# Altium PCB Tigershark 3D R1.6.PcbDoc (part 1 of 4)
Units mil, origin at the board's own origin, x right, y up, seen from the top; angles counter-clockwise.
Board outline 5500 x 4600 mil, 4 copper layers (Top Layer, Groun Plane, Power Plane, Bottom Layer); 326 components, 251 nets, 1041 pads, 903 vias.
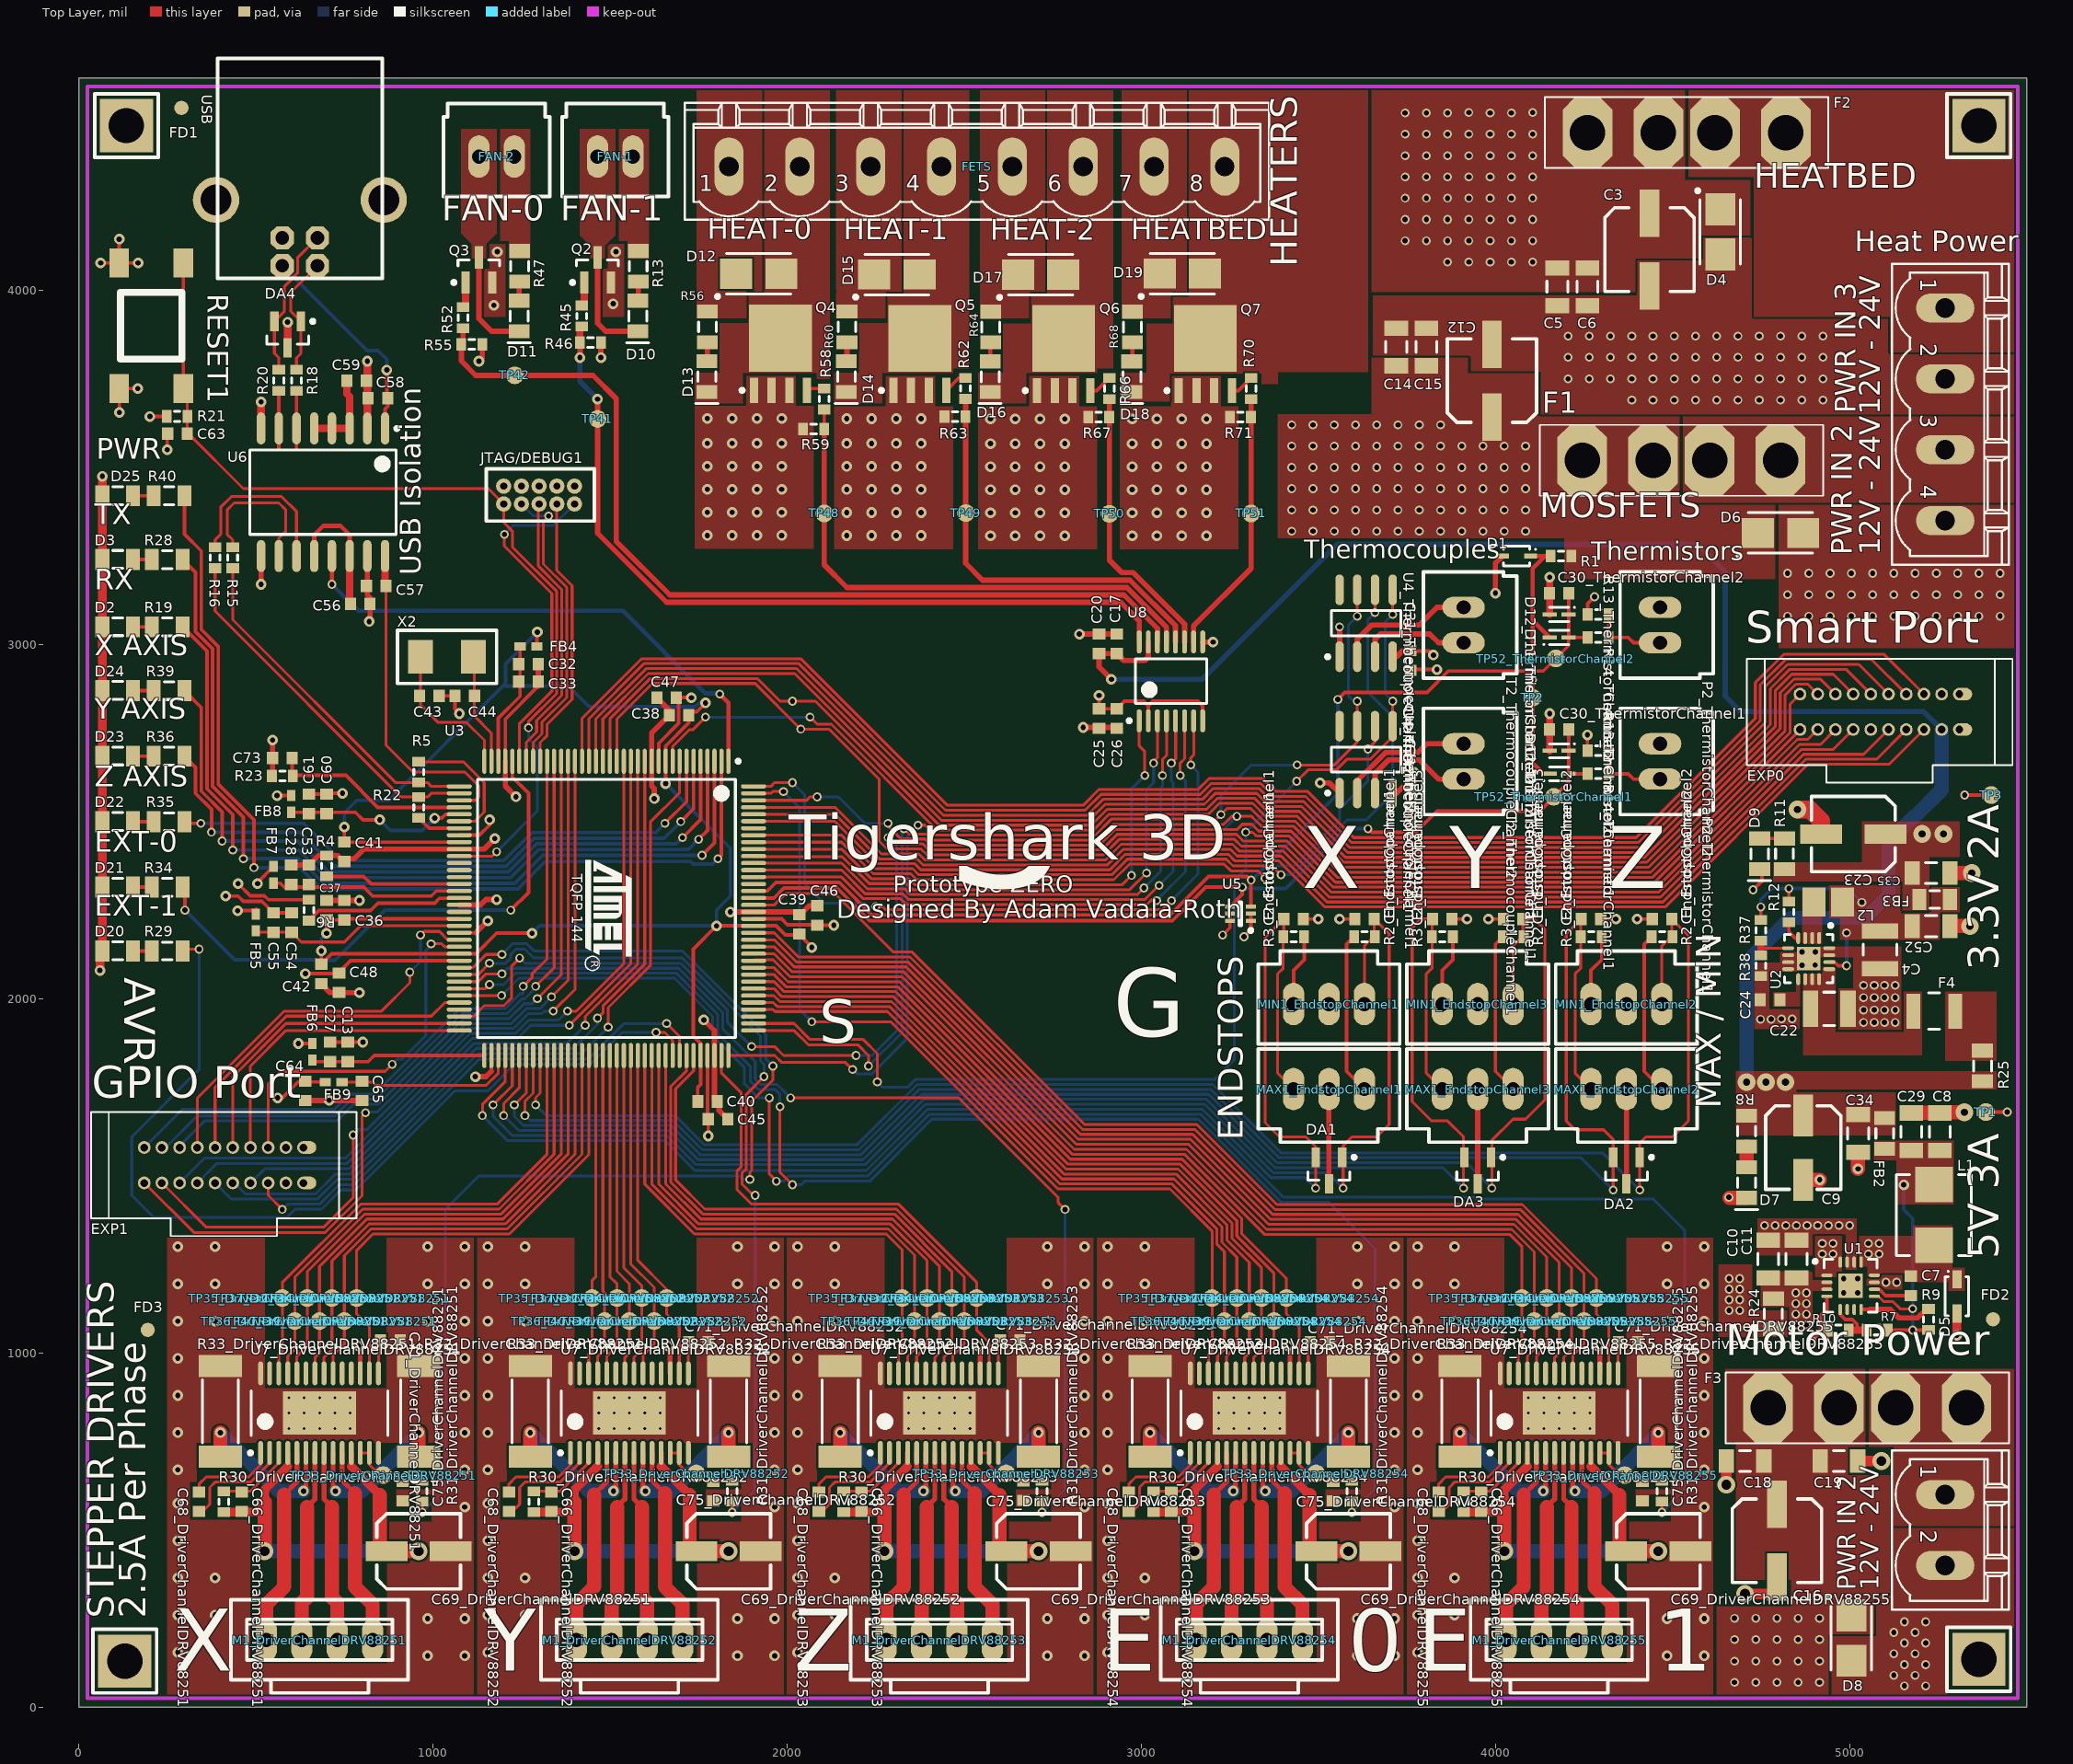
[diagram p0: Top Layer view]
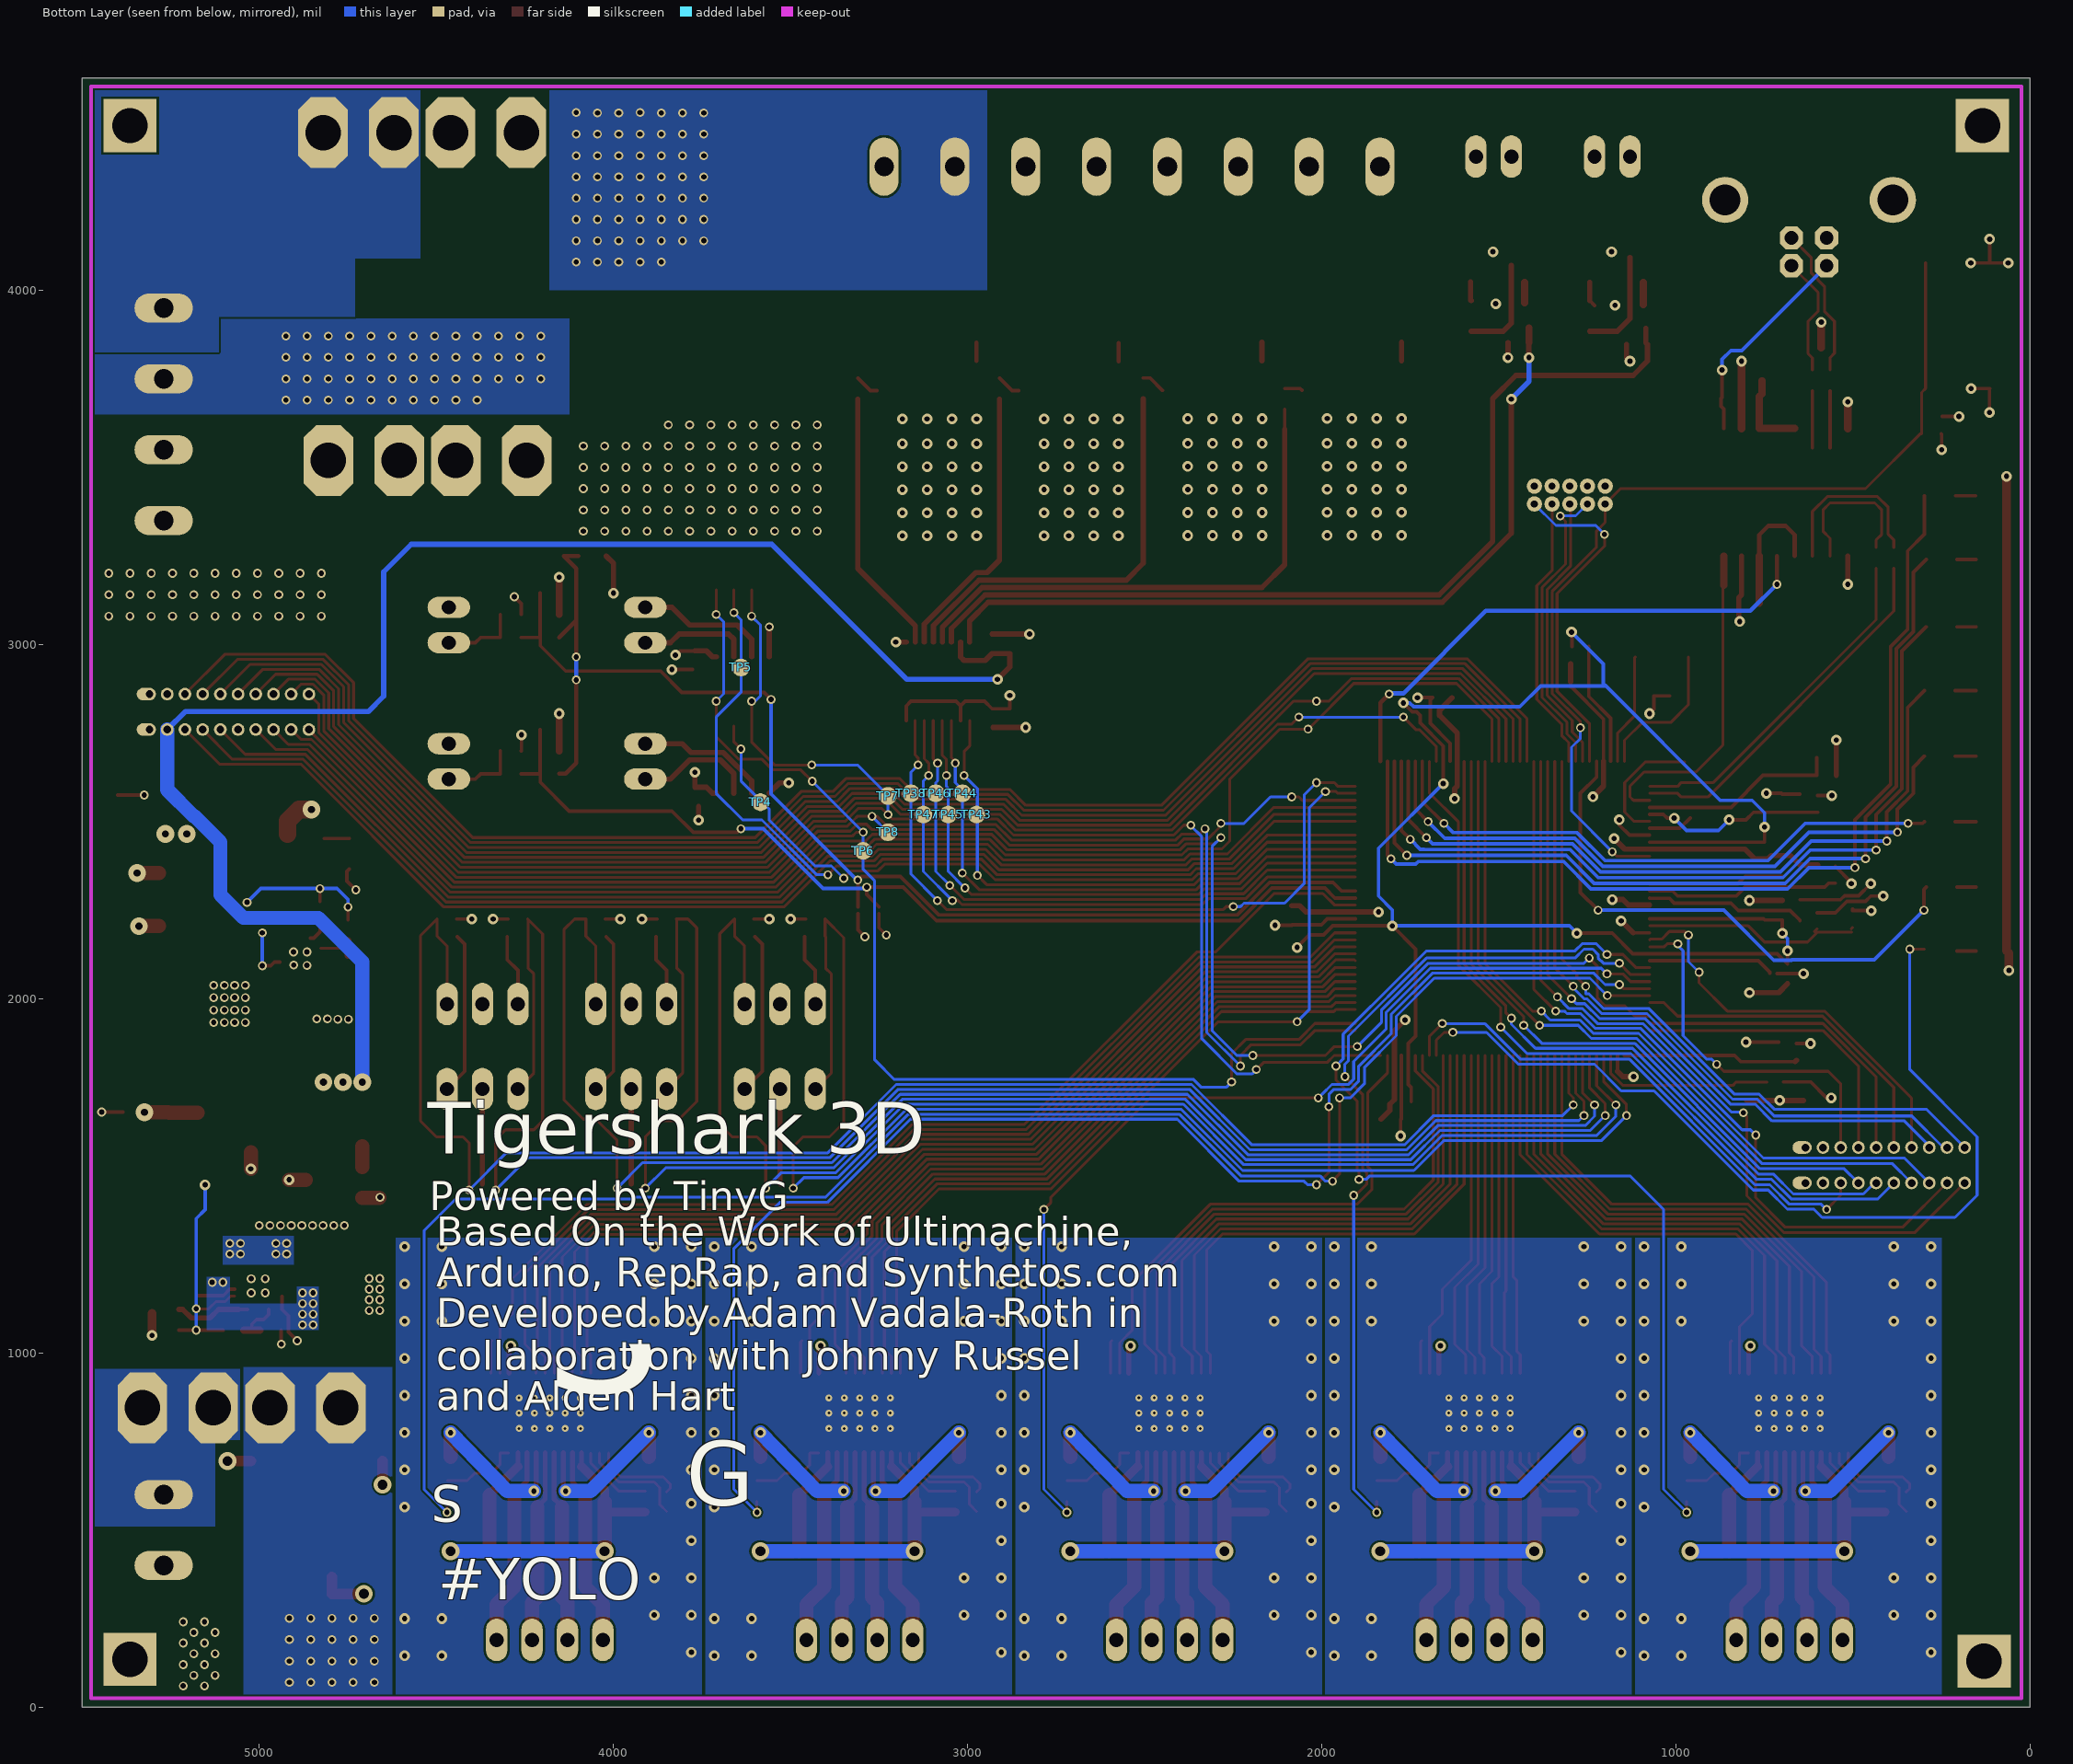
[diagram p1: Bottom Layer view, seen from below]
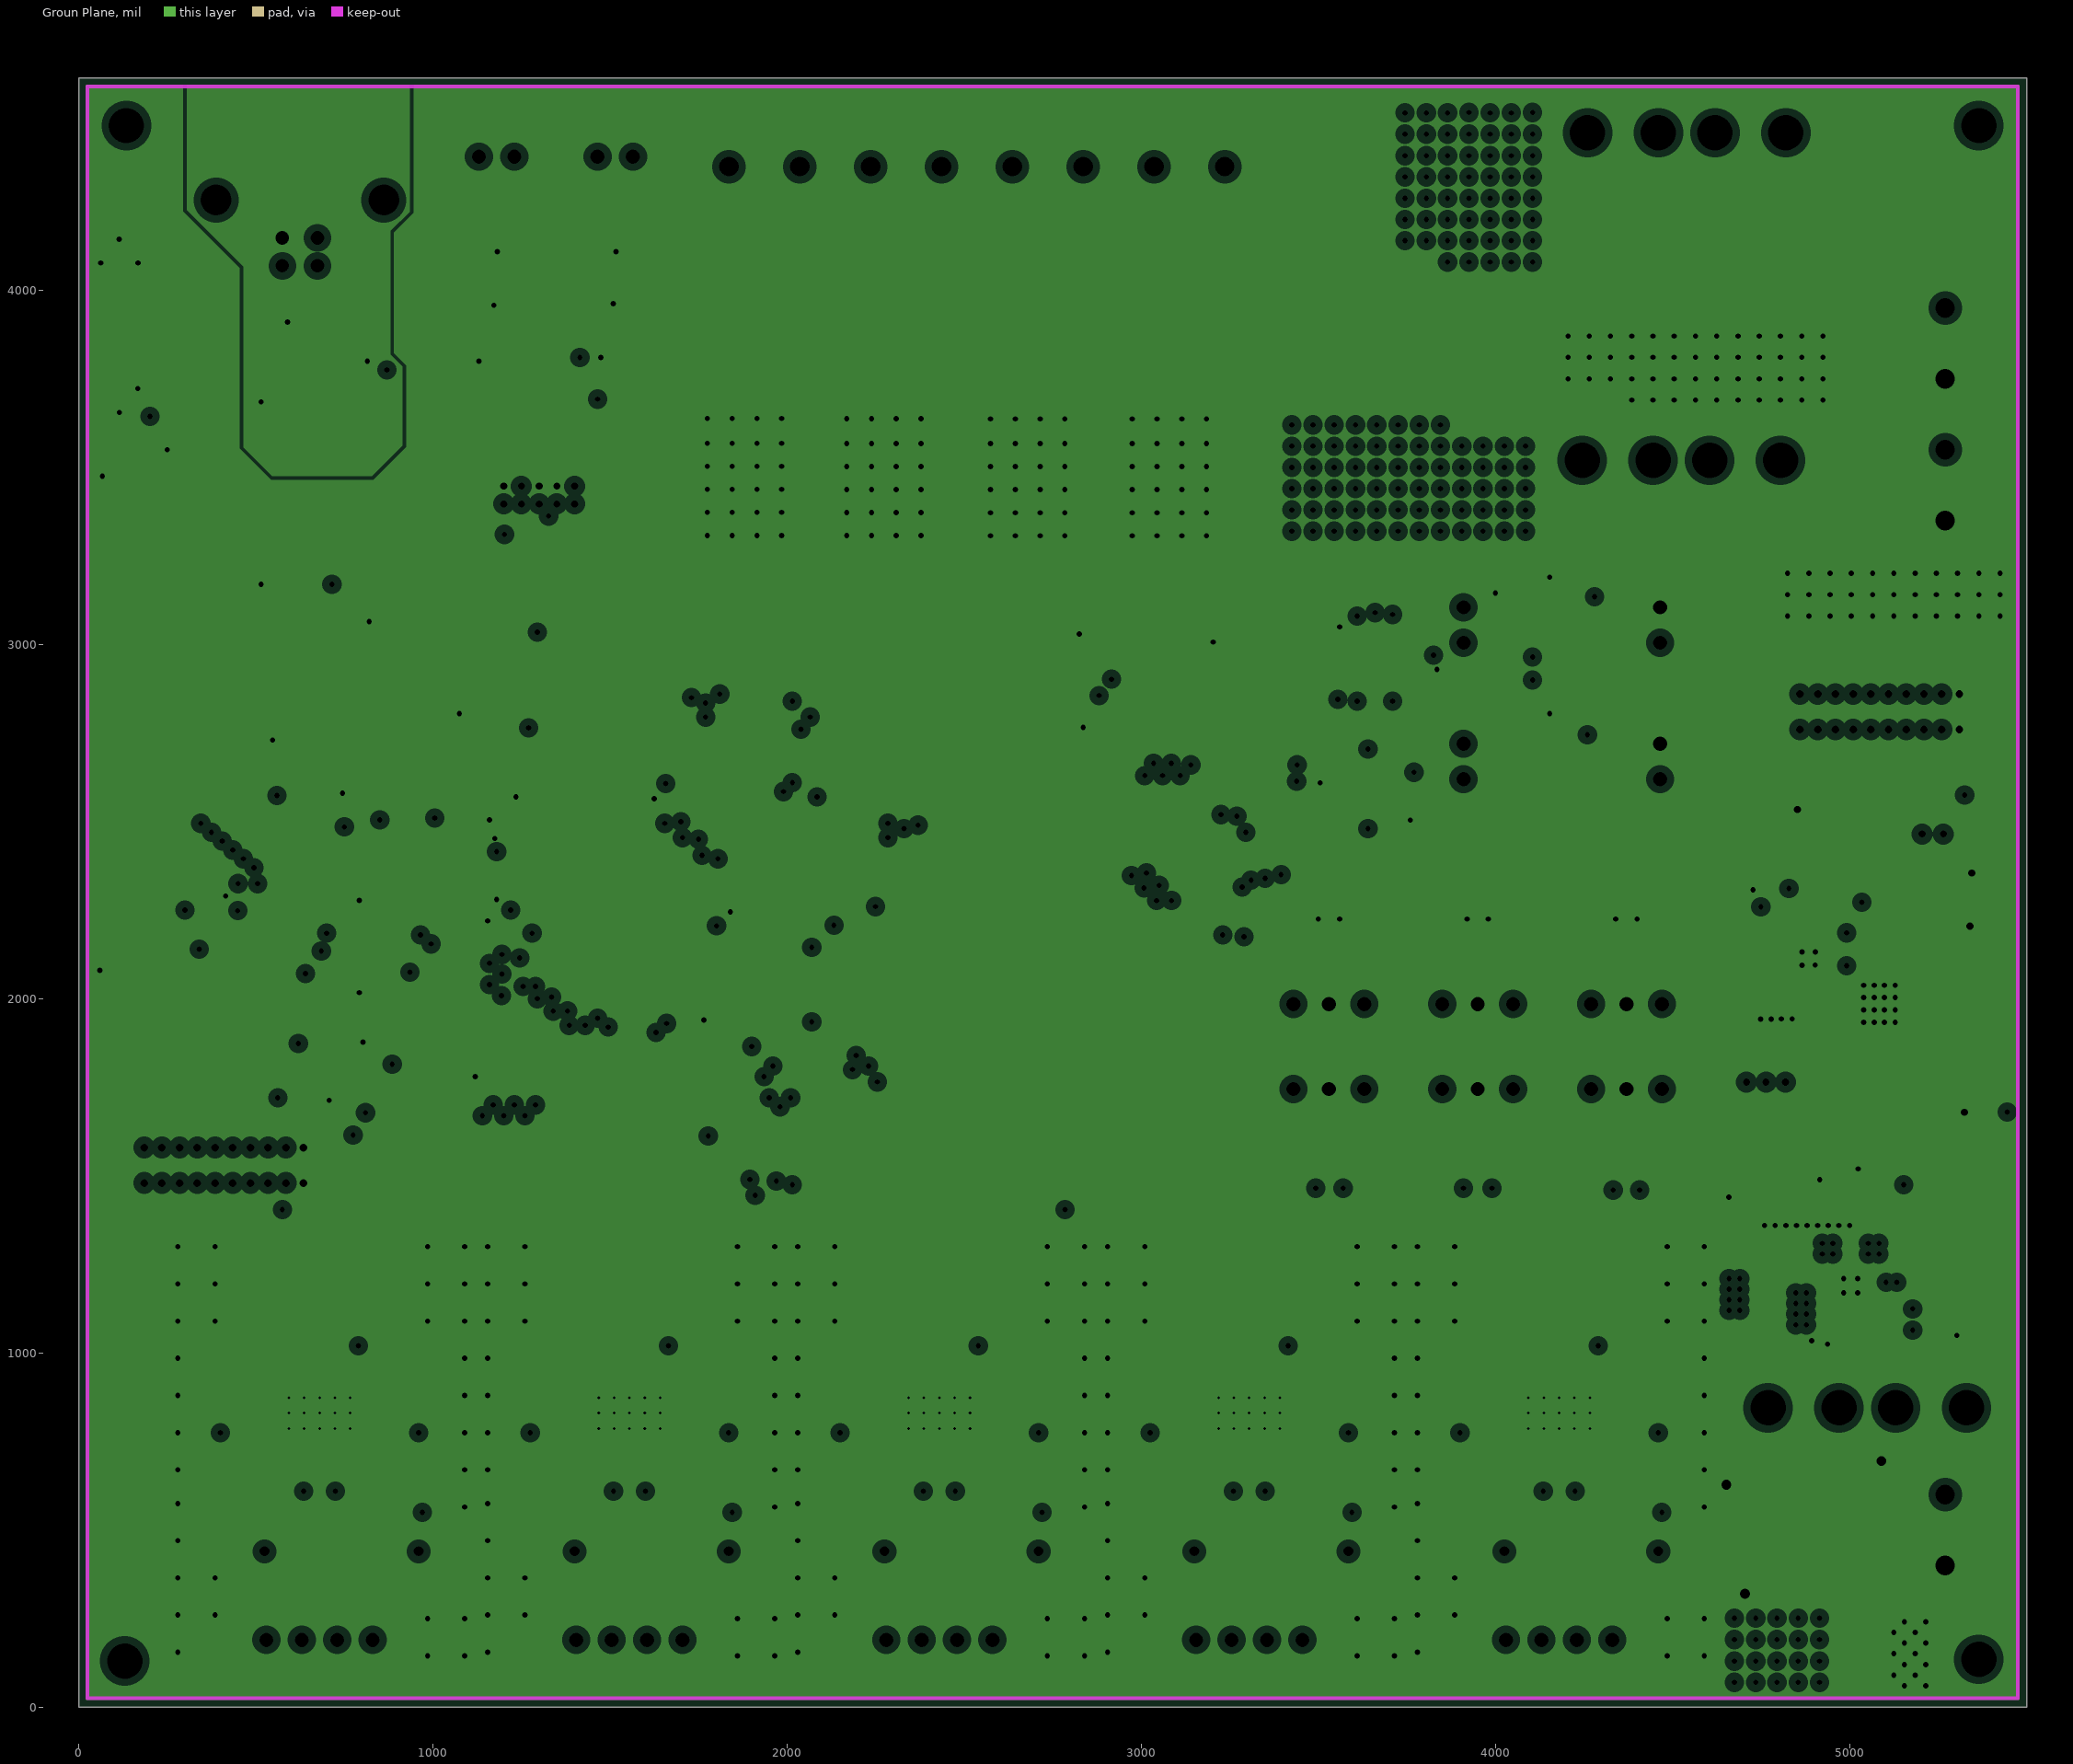
[diagram p2: Groun Plane, clearances drawn from the general rule]
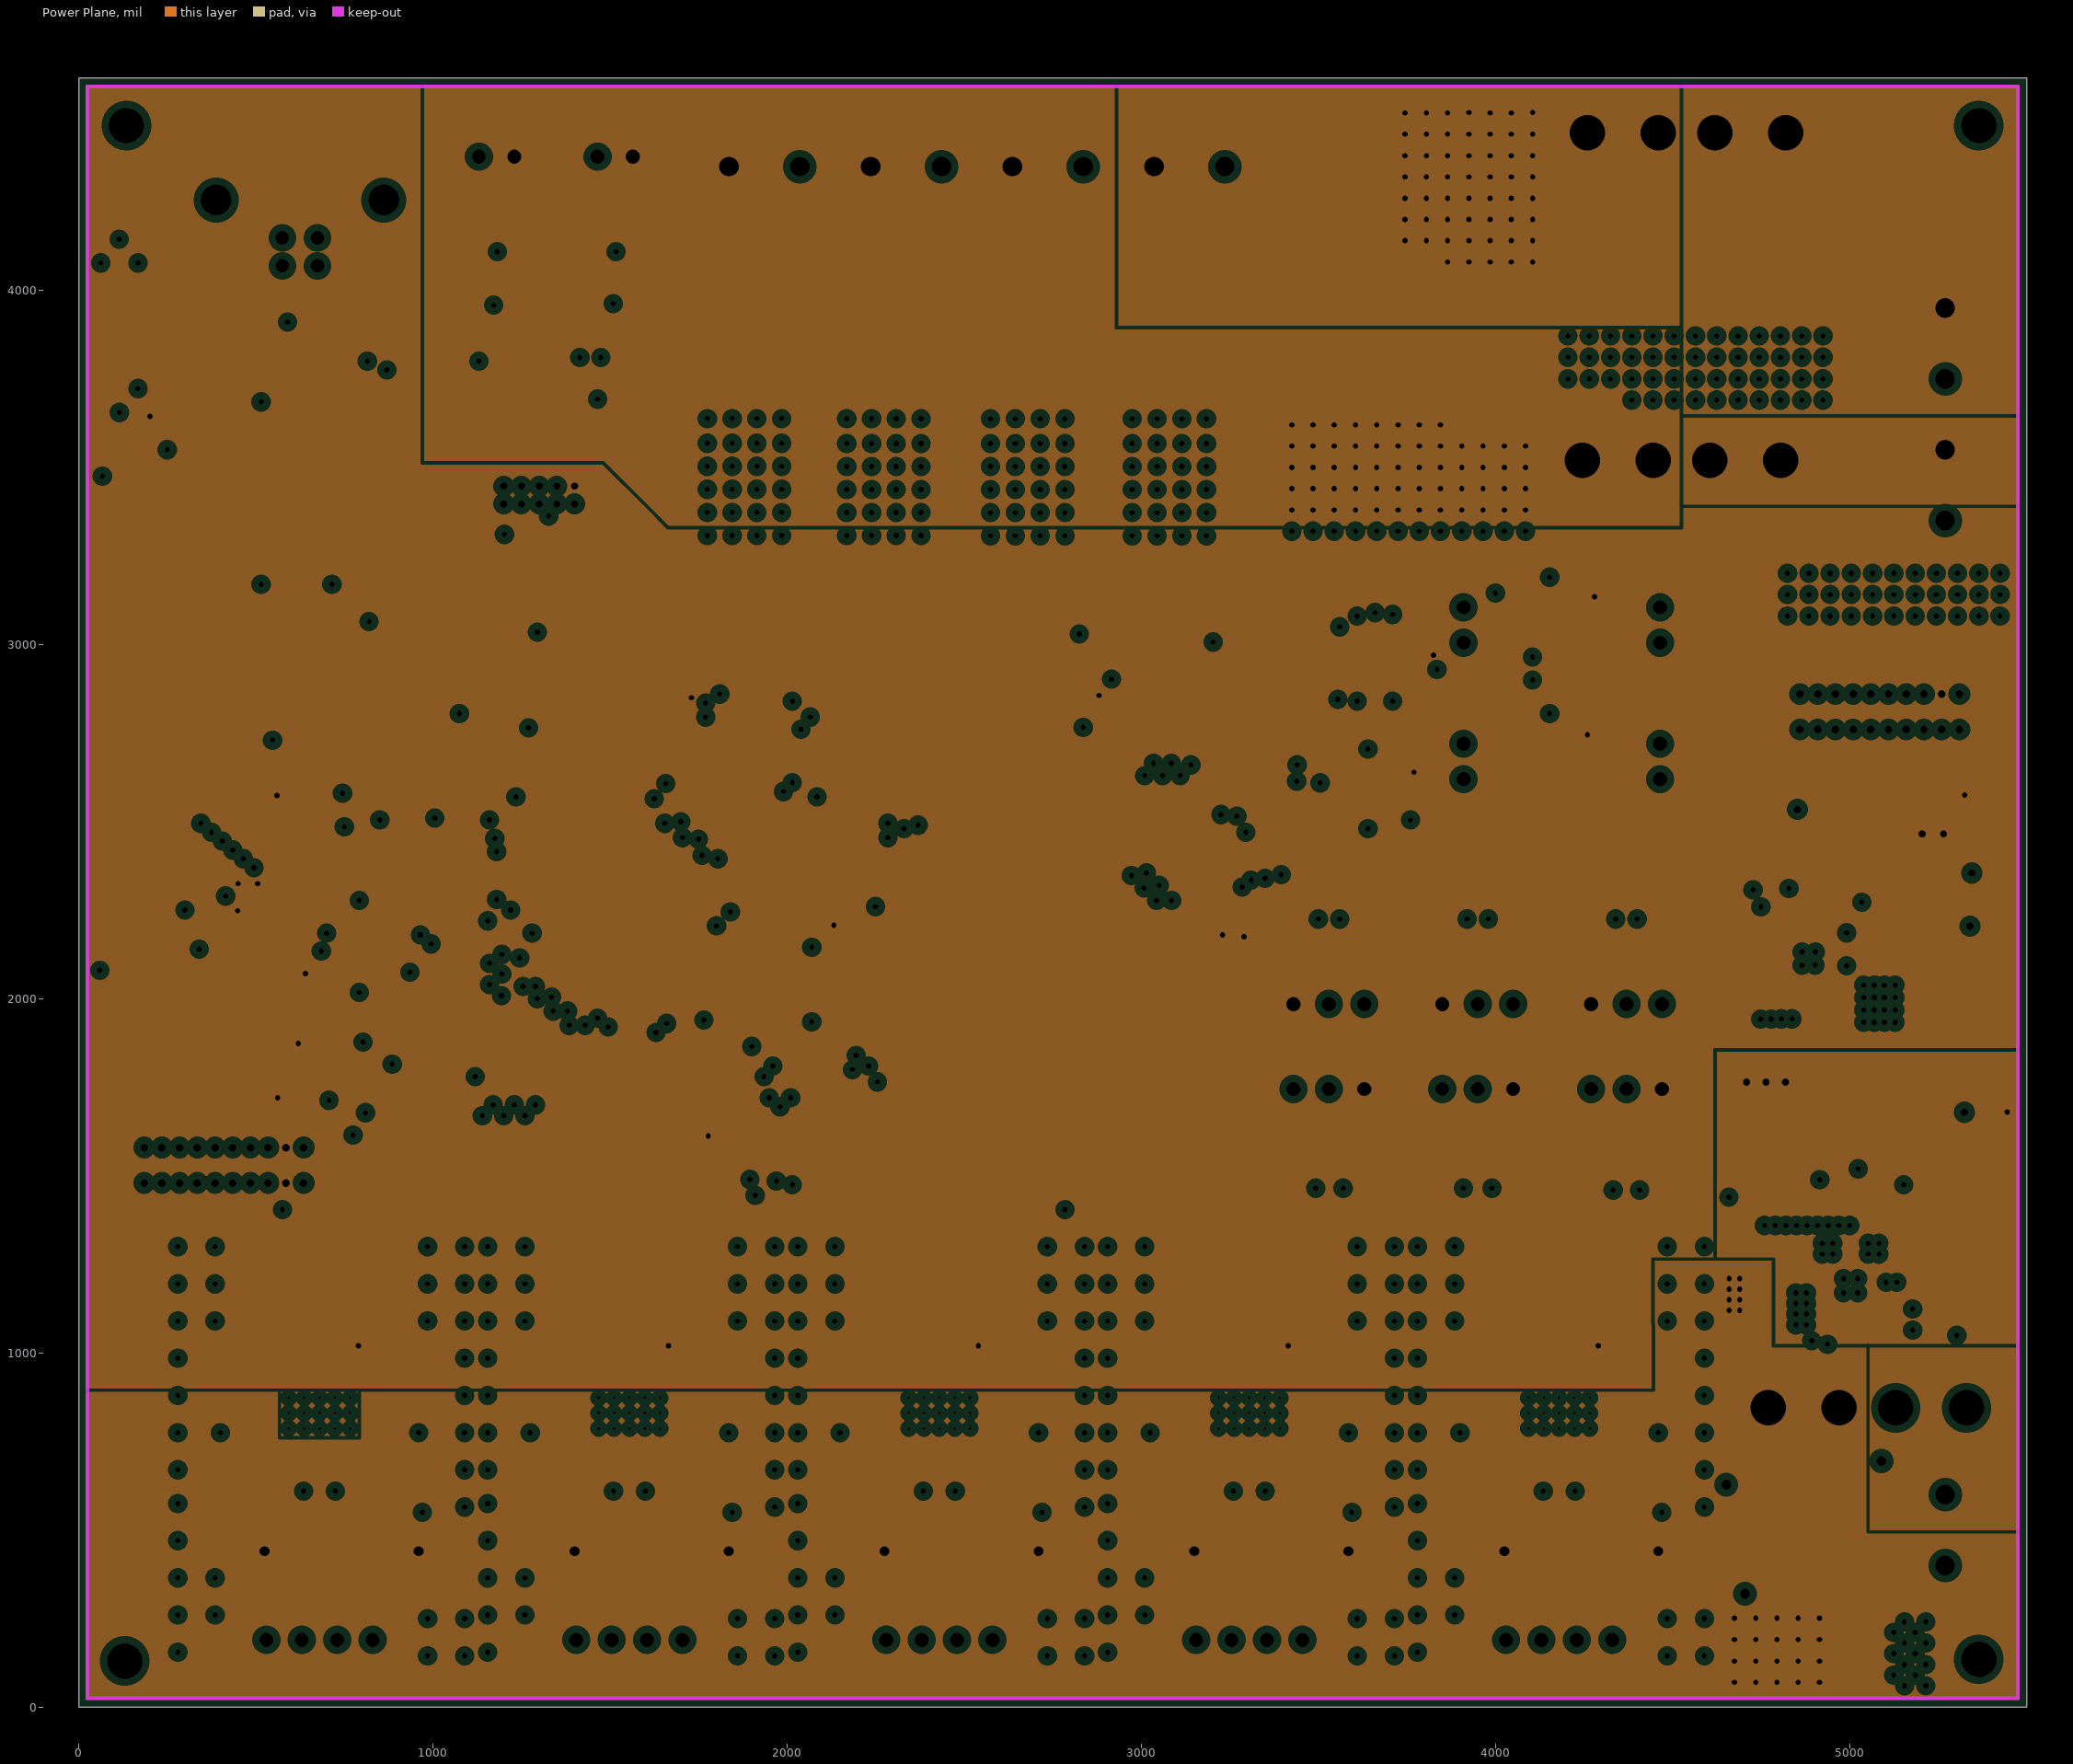
[diagram p3: Power Plane, clearances drawn from the general rule]

## Layer stack, top to bottom
Top Layer: signal copper 1.4
Dielectric: core 12.6, FR-4, Dk 4.8
Groun Plane: plane copper 1.4, net (Multiple Nets)
Dielectric: prepreg 12.6, FR-4, Dk 4.8
Power Plane: plane copper 1.4, net (Multiple Nets)
Dielectric: core 12.6, FR-4, Dk 4.8
Bottom Layer: signal copper 1.4

## Board outline
0,0 0,4600 5500,4600 5500,0

## Design rules (kind name [scope] priority, off if disabled: settings)
Clearance [All] p1: gap=6
ComponentClearance [All] p1: gap=0 collisioncheckmode=3 verticalgap=10 showdistances=FALSE
DiffPairsRouting [All] p1: maxlimit=10 minlimit=10 mostfreqgap=10 maxuncoupledlength=500
FanoutControl Fanout_SOIC [(InComponent('U8') AND InComponent('U7'))] p3: bgadir=Out bgaviamode=Centered fanoutstyle=Staggered fanoutdirection=Alternating viagrid=1 // Fanout_SOIC (Default Rule)
FanoutControl Fanout_Small [All] p4: bgadir=Out bgaviamode=Centered fanoutstyle=Auto fanoutdirection=Alternating viagrid=1 // Fanout_Small (Default Rule)
HoleSize [All] p1: absolutevalues=TRUE maxlimit=120 minlimit=1 maxpercent=80.000 minpercent=20.000
MinimumSolderMaskSliver [All] p1 off: minsoldermaskwidth=10
PlaneClearance [All] p1: clearance=20
PlaneConnect [All] p1: planeconnectstyle=Direct reliefexpansion=20 reliefentries=4 reliefconductorwidth=10 reliefairgap=10
PolygonConnect [All] p1: connectstyle=Direct reliefconductorwidth=45 reliefentries=4 polygonreliefangle="90 Angle" airgapwidth=10
RoomDefinition DriverChannelDRV88255 [InComponentClass('DriverChannelDRV88255')] p1: confinementstyle=ConfineIn formatcopy=TRUE lockcomponents=FALSE outline 3750,25 4625,25 4625,1425 3750,1425
RoomDefinition DriverChannelDRV88254 [InComponentClass('DriverChannelDRV88254')] p2: confinementstyle=ConfineIn formatcopy=TRUE lockcomponents=FALSE outline 2875,25 3750,25 3750,1425 2875,1425
RoomDefinition DriverChannelDRV88253 [InComponentClass('DriverChannelDRV88253')] p3: confinementstyle=ConfineIn formatcopy=TRUE lockcomponents=FALSE outline 2000,25 2875,25 2875,1425 2000,1425
RoomDefinition DriverChannelDRV88252 [InComponentClass('DriverChannelDRV88252')] p4: confinementstyle=ConfineIn formatcopy=TRUE lockcomponents=FALSE outline 1125,25 2000,25 2000,1425 1125,1425
RoomDefinition DriverChannelDRV88251 [InComponentClass('DriverChannelDRV88251')] p5: confinementstyle=ConfineIn formatcopy=TRUE lockcomponents=FALSE outline 250,25 1125,25 1125,1425 250,1425
RoutingVias [All] p1: holewidth=15 width=25 viastyle="Through Hole" minholewidth=15 minwidth=25 maxholewidth=28 maxwidth=50
SilkToSilkClearance [All] p1 off: silktosilkclearance=10
SilkToSolderMaskClearance SilkscreenOverComponentPads [IsPad] p1 off: minsilkscreentomaskgap=10 clearancetoexposedcopper=TRUE
SolderMaskExpansion [All] p1: expansion=4
Width [All] p1: maxlimit=200 minlimit=6 preferedwidth=6 minimp=50.000000 maximp=50.000000 favimp=50.000000
18 further rules are at their usual default settings.

## Classes and differential pairs
component class "U_MOSFETs and Driver": C17 C20 C25 C26 D10 D11 D12 D13 D14 D15 D16 D17 D18 D19 FAN-1 FAN-2 FETS Q2 Q3 Q4 Q5 Q6 Q7 R13 R45 R46 R47 R52 R55 R56 R58 R59 R60 R62 R63 R64 R66 R67 R68 R70 R71 TP38 TP41 TP42 TP43 TP44 TP45 TP46 TP47 TP48 TP49 TP50 TP51 U8
channel class "Thermocouple Channel": ThermocoupleChannel1 ThermocoupleChannel2
channel class "Endstop Channel": EndstopChannel1 EndstopChannel2 EndstopChannel3
channel class "Driver Channel DRV8825": DriverChannelDRV88251 DriverChannelDRV88252 DriverChannelDRV88253 DriverChannelDRV88254 DriverChannelDRV88255
component class ThermocoupleChannel2: C31_ThermocoupleChannel2 T2_ThermocoupleChannel2 U4_ThermocoupleChannel2
component class ThermocoupleChannel1: C31_ThermocoupleChannel1 T2_ThermocoupleChannel1 U4_ThermocoupleChannel1
component class EndstopChannel3: C1_EndstopChannel3 C2_EndstopChannel3 MAX1_EndstopChannel3 MIN1_EndstopChannel3 R2_EndstopChannel3 R3_EndstopChannel3
component class EndstopChannel2: C1_EndstopChannel2 C2_EndstopChannel2 MAX1_EndstopChannel2 MIN1_EndstopChannel2 R2_EndstopChannel2 R3_EndstopChannel2
component class EndstopChannel1: C1_EndstopChannel1 C2_EndstopChannel1 MAX1_EndstopChannel1 MIN1_EndstopChannel1 R2_EndstopChannel1 R3_EndstopChannel1
component class DriverChannelDRV88255: C66_DriverChannelDRV88255 C68_DriverChannelDRV88255 C69_DriverChannelDRV88255 C71_DriverChannelDRV88255 C75_DriverChannelDRV88255 M1_DriverChannelDRV88255 R30_DriverChannelDRV88255 R31_DriverChannelDRV88255 R32_DriverChannelDRV88255 R33_DriverChannelDRV88255 TP32_DriverChannelDRV88255 TP33_DriverChannelDRV88255 TP34_DriverChannelDRV88255 TP35_DriverChannelDRV88255 TP36_DriverChannelDRV88255 TP37_DriverChannelDRV88255 TP39_DriverChannelDRV88255 TP40_DriverChannelDRV88255 U7_DriverChannelDRV88255
component class DriverChannelDRV88254: C66_DriverChannelDRV88254 C68_DriverChannelDRV88254 C69_DriverChannelDRV88254 C71_DriverChannelDRV88254 C75_DriverChannelDRV88254 M1_DriverChannelDRV88254 R30_DriverChannelDRV88254 R31_DriverChannelDRV88254 R32_DriverChannelDRV88254 R33_DriverChannelDRV88254 TP32_DriverChannelDRV88254 TP33_DriverChannelDRV88254 TP34_DriverChannelDRV88254 TP35_DriverChannelDRV88254 TP36_DriverChannelDRV88254 TP37_DriverChannelDRV88254 TP39_DriverChannelDRV88254 TP40_DriverChannelDRV88254 U7_DriverChannelDRV88254
component class DriverChannelDRV88253: C66_DriverChannelDRV88253 C68_DriverChannelDRV88253 C69_DriverChannelDRV88253 C71_DriverChannelDRV88253 C75_DriverChannelDRV88253 M1_DriverChannelDRV88253 R30_DriverChannelDRV88253 R31_DriverChannelDRV88253 R32_DriverChannelDRV88253 R33_DriverChannelDRV88253 TP32_DriverChannelDRV88253 TP33_DriverChannelDRV88253 TP34_DriverChannelDRV88253 TP35_DriverChannelDRV88253 TP36_DriverChannelDRV88253 TP37_DriverChannelDRV88253 TP39_DriverChannelDRV88253 TP40_DriverChannelDRV88253 U7_DriverChannelDRV88253
component class DriverChannelDRV88252: C66_DriverChannelDRV88252 C68_DriverChannelDRV88252 C69_DriverChannelDRV88252 C71_DriverChannelDRV88252 C75_DriverChannelDRV88252 M1_DriverChannelDRV88252 R30_DriverChannelDRV88252 R31_DriverChannelDRV88252 R32_DriverChannelDRV88252 R33_DriverChannelDRV88252 TP32_DriverChannelDRV88252 TP33_DriverChannelDRV88252 TP34_DriverChannelDRV88252 TP35_DriverChannelDRV88252 TP36_DriverChannelDRV88252 TP37_DriverChannelDRV88252 TP39_DriverChannelDRV88252 TP40_DriverChannelDRV88252 U7_DriverChannelDRV88252
component class DriverChannelDRV88251: C66_DriverChannelDRV88251 C68_DriverChannelDRV88251 C69_DriverChannelDRV88251 C71_DriverChannelDRV88251 C75_DriverChannelDRV88251 M1_DriverChannelDRV88251 R30_DriverChannelDRV88251 R31_DriverChannelDRV88251 R32_DriverChannelDRV88251 R33_DriverChannelDRV88251 TP32_DriverChannelDRV88251 TP33_DriverChannelDRV88251 TP34_DriverChannelDRV88251 TP35_DriverChannelDRV88251 TP36_DriverChannelDRV88251 TP37_DriverChannelDRV88251 TP39_DriverChannelDRV88251 TP40_DriverChannelDRV88251 U7_DriverChannelDRV88251
component class "ATSAM3X8E Main Controller": C13 C27 C28 C32 C33 C36 C37 C38 C39 C40 C41 C42 C43 C44 C45 C46 C47 C48 C53 C54 C55 C56 C57 C58 C59 C60 C61 C63 C64 C65 C73 D2 D3 D20 D21 D22 D23 D24 D25 DA1 DA2 DA3 DA4 EXP0 EXP1 FB4 FB5 FB6 FB7 FB8 FB9 FD1 FD2 FD3 JTAG/DEBUG1 R4 R5 R6 R15 R16 R18 R19 R20 R21 R22 R23 R28 R29 R34 R35 R36 R39 R40 RESET1 TP4 TP5 TP6 TP7 TP8 U3 U5 U6 USB X2
component class Designator: C3 C4 C5 C6 C7 C8 C9 C10 C11 C12 C14 C15 C16 C18 C19 C22 C23 C24 C29 C34 C35 C52 D1 D4 D5 D6 D7 D8 D9 F1 F2 F3 F4 FB2 FB3 "Heat Power" L1 L2 "Motor Power" R1 R7 R8 R9 R10 R11 R12 R24 R25 R37 R38 TP1 TP2 TP3 U1 U2
net class MAX_ES_BUS[1..3]: MAX_ES0
net class MIN_ES_BUS[1..3]: MIN_ES0
net class MISO[1..2]: MISO0 MISO1 MISO2
net class SCLK[1..2]: SCLK0 SCLK1 SCLK2
net class TC_CS_BUS[1..2]: TC_CS0
net class THERM_AN_BUS[1..2]: THERM_AN0
component class ThermistorChannel1: C30_ThermistorChannel1 D11_ThermistorChannel1 D12_ThermistorChannel1 P2_ThermistorChannel1 R13_ThermistorChannel1 R14_ThermistorChannel1 TP52_ThermistorChannel1
component class ThermistorChannel2: C30_ThermistorChannel2 D11_ThermistorChannel2 D12_ThermistorChannel2 P2_ThermistorChannel2 R13_ThermistorChannel2 R14_ThermistorChannel2 TP52_ThermistorChannel2
channel class "Thermistor Channel": ThermistorChannel1 ThermistorChannel2
differential pair UMCU: +UMCU_P -UMCU_N
differential pair UI: +UI_P -UI_N
differential pair UD: +UD_P -UD_N
differential pair R: +R_P -R_N

## Components (designator, comment, footprint, x,y, rotation, side; value= is the part's Value field where it differs from the comment)
C1_EndstopChannel1 "0603" 1608[0603] 3630.47,2225 r180 top (schematic designator C1)
C1_EndstopChannel2 "0603" 1608[0603] 4470.47,2225 r180 top (schematic designator C1)
C1_EndstopChannel3 "0603" 1608[0603] 4050.47,2225 r180 top (schematic designator C1)
C2_EndstopChannel1 "0603" 1608[0603] 3430,2225 r0 top (schematic designator C2)
C2_EndstopChannel2 "0603" 1608[0603] 4270,2225 r0 top (schematic designator C2)
C2_EndstopChannel3 "0603" 1608[0603] 3850,2225 r0 top (schematic designator C2)
C3 "VAS D" "Panasonic VS D" 4435,4115 r90 top
C4 "1210" C1210 5085.55,2138.18 r270 top
C5 "1206" C1206 4175,4010 r90 top
C6 "1206" C1206 4260,4010 r90 top
C7 "Cap Semi" 1608[0603] 5173.07,1189.53 r270 top
C8 "Cap Semi" C1206 5255.07,1624.53 r270 top
C9 "VS C" "Panasonic VS C" 4984.07,1459.53 r90 top
C10 "Cap Semi" C1206 4770,1265 r270 top
C11 "Cap Semi" C1206 4850,1265 r270 top
C12 "VAS D" "Panasonic VS D" 3990,3745 r270 top
C13 "0603" 1608[0603] 760,1850 r270 top
C14 "1206" C1206 3720,3840 r270 top
C15 "1206" C1206 3805,3840 r270 top
C16 "VAS D" "Panasonic VS D" 4795,470 r90 top
C17 "0603" 1608[0603] 2931,3002 r90 top
C18 "1206" C1206 4705,695 r0 top
C19 "1206" C1206 4970,695 r180 top
C20 "0603" 1608[0603] 2881,3002 r90 top
C22 "1210" C1210 4942.55,1971.18 r0 top
C23 "VS C" "Panasonic VS C" 4890.55,2350 r0 top
C24 "0603" 1608[0603] 4775.55,1997.18 r0 top
C25 "0603" 1608[0603] 2881,2791 r90 top
C26 "0603" 1608[0603] 2931,2791 r270 top
C27 "0603" 1608[0603] 710,1850 r270 top
C28 "0603" 1608[0603] 600,2350 r270 top
C29 "1206" C1206 5174.07,1624.53 r90 top
C30_ThermistorChannel1 "Cap Semi" 1608[0603] 4180,2760 r0 top (schematic designator C30)
C30_ThermistorChannel2 "Cap Semi" 1608[0603] 4180,3145 r0 top (schematic designator C30)
C31_ThermocoupleChannel1 "Cap Semi" 1608[0603] 3760,2570 r90 top (schematic designator C31)
C31_ThermocoupleChannel2 "Cap Semi" 1608[0603] 3760,2955 r90 top (schematic designator C31)
C32 "0603" 1608[0603] 1270,2945 r180 top
C33 "0603" 1608[0603] 1270,2895 r180 top
C34 "1206" C1206 5024.07,1619.53 r270 top
C35 "1206" C1206 5230,2355 r0 top
C36 "0603" 1608[0603] 750,2250 r270 top
C37 "0603" 1608[0603] 700,2250 r270 top
C38 "0603" 1608[0603] 1695,2800 r0 top
C39 "0603" 1608[0603] 2035,2210 r270 top
C40 "0603" 1608[0603] 1775.43,1710 r180 top
C41 "0603" 1608[0603] 750,2415 r90 top
C42 "0603" 1608[0603] 685,2070 r90 top
C43 "0603" 1608[0603] 990,2855 r180 top
C44 "0603" 1608[0603] 1090,2855 r0 top
C45 "0603" 1608[0603] 1805,1660 r180 top
C46 "0603" 1608[0603] 2085,2235 r270 top
C47 "0603" 1608[0603] 1660,2850 r0 top
C48 "0603" 1608[0603] 735,2045 r90 top
C52 "1206" C1206 5230,2205 r0 top
C53 "0603" 1608[0603] 650,2350 r270 top
C54 "0603" 1608[0603] 601.22,2215 r270 top
C55 "0603" 1608[0603] 550,2215 r270 top
C56 "0603" 1608[0603] 795,3115 r180 top
C57 "0603" 1608[0603] 840,3165 r0 top
C58 "0603" 1608[0603] 845,3695 r0 top
C59 "0603" 1608[0603] 785,3745 r180 top
C60 "0603" 1608[0603] 700,2550 r270 top
C61 "0603" 1608[0603] 650,2550 r270 top
C63 "Cap Semi" 1608[0603] 279,3595 r0 top
C64 "0603" 1608[0603] 640,1740 r90 top
C65 "0603" 1608[0603] 800,1740 r90 top
C66_DriverChannelDRV88251 "0603" 1608[0603] 460,580 r90 top (schematic designator C66)
C66_DriverChannelDRV88252 "0603" 1608[0603] 1335,580 r90 top (schematic designator C66)
C66_DriverChannelDRV88253 "0603" 1608[0603] 2210,580 r90 top (schematic designator C66)
C66_DriverChannelDRV88254 "0603" 1608[0603] 3085,580 r90 top (schematic designator C66)
C66_DriverChannelDRV88255 "0603" 1608[0603] 3960,580 r90 top (schematic designator C66)
C68_DriverChannelDRV88251 "0603" 1608[0603] 340,580 r270 top (schematic designator C68)
C68_DriverChannelDRV88252 "0603" 1608[0603] 1215,580 r270 top (schematic designator C68)
C68_DriverChannelDRV88253 "0603" 1608[0603] 2090,580 r270 top (schematic designator C68)
C68_DriverChannelDRV88254 "0603" 1608[0603] 2965,580 r270 top (schematic designator C68)
C68_DriverChannelDRV88255 "0603" 1608[0603] 3840,580 r270 top (schematic designator C68)
C69_DriverChannelDRV88251 "VS C" "Panasonic VS C" 1080,555 r180 top (schematic designator C69)
C69_DriverChannelDRV88252 "VS C" "Panasonic VS C" 1955,555 r180 top (schematic designator C69)
C69_DriverChannelDRV88253 "VS C" "Panasonic VS C" 2830,555 r180 top (schematic designator C69)
C69_DriverChannelDRV88254 "VS C" "Panasonic VS C" 3705,555 r180 top (schematic designator C69)
C69_DriverChannelDRV88255 "VS C" "Panasonic VS C" 4580,555 r180 top (schematic designator C69)
C71_DriverChannelDRV88251 "0603" 1608[0603] 880,1035 r180 top (schematic designator C71)
C71_DriverChannelDRV88252 "0603" 1608[0603] 1750,1030 r180 top (schematic designator C71)
C71_DriverChannelDRV88253 "0603" 1608[0603] 2630,1035 r180 top (schematic designator C71)
C71_DriverChannelDRV88254 "0603" 1608[0603] 3505,1030 r180 top (schematic designator C71)
C71_DriverChannelDRV88255 "0603" 1608[0603] 4375,1030 r180 top (schematic designator C71)
C73 "0603" 1608[0603] 575,2680 r0 top
C75_DriverChannelDRV88251 "0603" 1608[0603] 915,610 r90 top locked (schematic designator C75)
C75_DriverChannelDRV88252 "0603" 1608[0603] 1792,610 r90 top (schematic designator C75)
C75_DriverChannelDRV88253 "0603" 1608[0603] 2667,611 r90 top (schematic designator C75)
C75_DriverChannelDRV88254 "0603" 1608[0603] 3542,610 r90 top (schematic designator C75)
C75_DriverChannelDRV88255 "0603" 1608[0603] 4415,610 r90 top locked (schematic designator C75)
D1 "SZMM3Z4V7T1G" SZMM3Z4V7T1G 4060,3250 r0 top
D2 "LED2" "SM 0805 - gap trimmed" 110,3050 r180 top
D3 "LED2" "SM 0805 - gap trimmed" 110,3240 r180 top
D4 "SK310A-TP" SK310A-TP 4635,4165 r90 top
D5 "PMEG1030EH_EJ" PMEG1030EH_EJ 5303.07,1159.53 r90 top
D6 "SK310A-TP" SK310A-TP 4805,3315 r180 top
D7 "LED2" "SM 0805 polarized" 4665.57,1401.3 r90 top
D8 "SK310A-TP" SK310A-TP 5005,195 r90 top
D9 "LED2" "SM 0805 polarized" 4702.55,2329.18 r90 top
D10 "LED1" "SM 0805 polarized" 1535,3847.58 r90 top
D11 "LED1" "SM 0805 polarized" 1200,3847.58 r90 top
D11_ThermistorChannel1 "Diode 1N4148" 1N4148WT 4180,2635 r180 top (schematic designator D11)
D11_ThermistorChannel2 "Diode 1N4148" 1N4148WT 4180,3020 r180 top (schematic designator D11)
D12 "B240A-13-F" SK310A-TP 1920,4046.64 r180 top
D12_ThermistorChannel1 "Diode 1N4148" 1N4148WT 4180,2700 r0 top (schematic designator D12)
D12_ThermistorChannel2 "Diode 1N4148" 1N4148WT 4180,3085 r0 top (schematic designator D12)
D13 "LED1" "SM 0805 polarized" 1730,3676.64 r90 top
D14 "LED1" "SM 0805 polarized" 2124,3676.64 r90 top
D15 "B240A-13-F" SK310A-TP 2310,4044.64 r180 top
D16 "LED1" "SM 0805 polarized" 2530,3676.22 r90 top
D17 "B240A-13-F" SK310A-TP 2716,4044.22 r180 top
D18 "LED1" "SM 0805 polarized" 2930,3676.22 r90 top
D19 "B240A-13-F" SK310A-TP 3116,4046.85 r180 top
D20 "LED2" "SM 0805 - gap trimmed" 110,2135 r180 top
D21 "LED2" "SM 0805 - gap trimmed" 110,2315 r180 top
D22 "LED2" "SM 0805 - gap trimmed" 110,2500 r180 top
D23 "LED2" "SM 0805 - gap trimmed" 110,2685 r180 top
D24 "LED2" "SM 0805 - gap trimmed" 110,2870 r180 top
D25 "LED2" "SM 0805 - gap trimmed" 110,3420 r180 top
DA1 "PESDxL2BT" SOT95P230X110-3N 3530,1515 r270 top
DA2 "PESDxL2BT" SOT95P230X110-3N 4370,1515 r270 top
DA3 "PESDxL2BT" SOT95P230X110-3N 3950,1515 r270 top
DA4 "PESDxL2BT" SOT95P230X110-3N 590,3875 r270 top
EXP0 "10X2-0.1X0.05" 10X2-0.05X0.1w 5085,2810 r180 top
EXP1 "10X2-0.1X0.05" 10X2-0.05X0.1w 410,1530 r180 top
F1 "3522-2" "3522-2 - WAVE SOLDER" 4525,3520 r180 top
F2 "3522-2" "3522-2 - WAVE SOLDER" 4540,4445 r180 top
F3 "3522-2" "3522-2 - WAVE SOLDER" 5050,845 r180 top
F4 "LittleFuse F1210" F1210_M 5239,1965 r0 top
FAN-1 "Molex 70543-02" 70543-02 1515,4377.58 r180 top
FAN-2 "Molex 70543-02" 70543-02 1180,4377.58 r180 top
FB2 "MH2029-300Y" "SM 0805 - gap trimmed" 5099.07,1619.53 r90 top
FB3 "MH2029-300Y" "SM 0805 - gap trimmed" 5240,2280 r180 top
FB4 "BLM15HG601SN1D" BLM18PG121SN1D 1270,2995 r180 top
FB5 "BLM15HG601SN1D" BLM18PG121SN1D 500,2215 r270 top
FB6 "BLM15HG601SN1D" BLM18PG121SN1D 660,1850 r270 top
FB7 "BLM15HG601SN1D" BLM18PG121SN1D 550,2350 r270 top
FB8 "BLM15HG601SN1D" BLM18PG121SN1D 600,2550 r270 top
FB9 "BLM15HG601SN1D" BLM18PG121SN1D 720,1765 r0 top
FD1 "FIDUCIAL" FIDUCIAL-1X2 290,4515 r0 top
FD2 "FIDUCIAL" FIDUCIAL-1X2 5405,1095 r0 top
FD3 "FIDUCIAL" FIDUCIAL-1X2 195,1065 r0 top
FETS "con-phoenix-508 - 8" MSTBV4#1 2536,4349.22 r90 top
"Heat Power" "con-phoenix-508 - 4" MSTBV4#2 5270,3650 r270 top
JTAG/DEBUG1 "S9015E-05-ND" S9015E-05-ND 1200,3447 r0 top
L1 "Inductor" CIP0530LR3R3 5238.07,1389.53 r90 top
L2 "VLS252012T-2R2M1R3" VLS252012T-2R2M1R3 4939.55,2273.18 r0 top
M1_DriverChannelDRV88251 "Molex 0705430003" 4POL254 680,190 r0 top (schematic designator M1)
M1_DriverChannelDRV88252 "Molex 0705430003" 4POL254 1555,190 r0 top (schematic designator M1)
M1_DriverChannelDRV88253 "Molex 0705430003" 4POL254 2430,190 r0 top (schematic designator M1)
M1_DriverChannelDRV88254 "Molex 0705430003" 4POL254 3305,190 r0 top (schematic designator M1)
M1_DriverChannelDRV88255 "Molex 0705430003" 4POL254 4180,190 r0 top (schematic designator M1)
MAX1_EndstopChannel1 "Molex 70543-03" 70543-03 3530,1745 r0 top (schematic designator MAX1)
MAX1_EndstopChannel2 "Molex 70543-03" 70543-03 4370,1745 r0 top (schematic designator MAX1)
MAX1_EndstopChannel3 "Molex 70543-03" 70543-03 3950,1745 r0 top (schematic designator MAX1)
MIN1_EndstopChannel1 "Molex 70543-03" 70543-03 3530,1985 r180 top (schematic designator MIN1)
MIN1_EndstopChannel2 "Molex 70543-03" 70543-03 4370,1985 r180 top (schematic designator MIN1)
MIN1_EndstopChannel3 "Molex 70543-03" 70543-03 3950,1985 r180 top (schematic designator MIN1)
"Motor Power" "con-phoenix-508 - 2" "MSTBV2 - duplicate" 5270,300 r270 top
P2_ThermistorChannel1 "Molex 70543-02" 70543-02 4465,2670 r90 top (schematic designator P2)
P2_ThermistorChannel2 "Molex 70543-02" 70543-02 4465,3055 r90 top (schematic designator P2)
Q2 "IRML6346TRPBF" IRLML6346 1465,4057.58 r90 top
Q3 "IRML6346TRPBF" IRLML6346 1130,4057.58 r90 top
Q4 "PSMN7R0-60YS" PSMN7R0-60YS 1981.5,3820.02 r90 top
Q5 "PSMN7R0-60YS" PSMN7R0-60YS 2375,3819.64 r90 top
Q6 "PSMN7R0-60YS" PSMN7R0-60YS 2781,3819.22 r90 top
Q7 "PSMN7R0-60YS" PSMN7R0-60YS 3181,3819.22 r90 top
R1 "Res3" J1-0603 4185,3250 r0 top
R2_EndstopChannel1 "0603" J1-0603 3630.47,2175 r0 top (schematic designator R2)
R2_EndstopChannel2 "0603" J1-0603 4470.47,2175 r0 top (schematic designator R2)
R2_EndstopChannel3 "0603" J1-0603 4050.47,2175 r0 top (schematic designator R2)
R3_EndstopChannel1 "0603" J1-0603 3430.47,2175 r180 top (schematic designator R3)
R3_EndstopChannel2 "0603" J1-0603 4270.47,2175 r180 top (schematic designator R3)
R3_EndstopChannel3 "0603" J1-0603 3850.47,2175 r180 top (schematic designator R3)
R4 "0603" J1-0603 700,2375 r90 top
R5 "0603" J1-0603 960,2640 r90 top
R6 "0603" J1-0603 650,2250 r270 top
R7 "Res3" J1-0603 5078.07,1064.53 r0 top
R8 "Res3" "SM 0805 - gap trimmed" 4709.07,1626.3 r90 top
R9 "Res3" J1-0603 5223.07,1094.53 r90 top
R10 "Res3" J1-0603 4968.07,1064.53 r0 top
R11 "Res3" "SM 0805 - gap trimmed" 4816.55,2409.18 r270 top
R12 "0603" J1-0603 4828.55,2245.18 r90 top
R13 "0805" "SM 0805 - gap trimmed" 1580,4067.58 r270 top
R13_ThermistorChannel1 "Res3" J1-0603 4290,2700 r180 top (schematic designator R13)
R13_ThermistorChannel2 "Res3" J1-0603 4290,3085 r180 top (schematic designator R13)
R14_ThermistorChannel1 "Res3" J1-0603 4290,2635 r0 top (schematic designator R14)
R14_ThermistorChannel2 "Res3" J1-0603 4290,3020 r0 top (schematic designator R14)
R15 "0603" J1-0603 435,3245 r90 top
R16 "0603" J1-0603 385,3245 r90 top
R18 "0603" J1-0603 615,3745.88 r90 top
R19 "0805" "SM 0805 - gap trimmed" 250,3050 r0 top
R20 "0603" J1-0603 565,3745.88 r90 top
R21 "Res3" J1-0603 278,3644 r180 top
R22 "0603" J1-0603 960,2540 r270 top
R23 "0603" J1-0603 575,2628.78 r0 top
R24 "Res3" "SM 0805 - gap trimmed" 4785,1110 r270 top
R25 "Res3" "SM 0805 - gap trimmed" 5375,1810 r90 top
R28 "0805" "SM 0805 - gap trimmed" 250,3240 r0 top
R29 "0805" "SM 0805 - gap trimmed" 250,2135 r0 top
R30_DriverChannelDRV88251 "0603" J1-0603 410,580 r90 top (schematic designator R30)
R30_DriverChannelDRV88252 "0603" J1-0603 1285,580 r90 top (schematic designator R30)
R30_DriverChannelDRV88253 "0603" J1-0603 2160,580 r90 top (schematic designator R30)
R30_DriverChannelDRV88254 "0603" J1-0603 3035,580 r90 top (schematic designator R30)
R30_DriverChannelDRV88255 "0603" J1-0603 3910,580 r90 top (schematic designator R30)
R31_DriverChannelDRV88251 "0603" J1-0603 970,610 r270 top (schematic designator R31)
R31_DriverChannelDRV88252 "0603" J1-0603 1845,610 r270 top (schematic designator R31)
R31_DriverChannelDRV88253 "0603" J1-0603 2720,610 r270 top (schematic designator R31)
R31_DriverChannelDRV88254 "0603" J1-0603 3595,610 r270 top (schematic designator R31)
R31_DriverChannelDRV88255 "0603" J1-0603 4470,610 r270 top (schematic designator R31)
R32_DriverChannelDRV88251 "2512" Resistor2512 960,835 r270 top (schematic designator R32)
R32_DriverChannelDRV88252 "2512" Resistor2512 1835,835 r270 top (schematic designator R32)
R32_DriverChannelDRV88253 "2512" Resistor2512 2710,835 r270 top (schematic designator R32)
R32_DriverChannelDRV88254 "2512" Resistor2512 3585,835 r270 top (schematic designator R32)
R32_DriverChannelDRV88255 "2512" Resistor2512 4460,835 r270 top (schematic designator R32)
R33_DriverChannelDRV88251 "2512" Resistor2512 400,835 r270 top (schematic designator R33)
R33_DriverChannelDRV88252 "2512" Resistor2512 1275,835 r270 top (schematic designator R33)
R33_DriverChannelDRV88253 "2512" Resistor2512 2150,835 r270 top (schematic designator R33)
R33_DriverChannelDRV88254 "2512" Resistor2512 3025,835 r270 top (schematic designator R33)
R33_DriverChannelDRV88255 "2512" Resistor2512 3900,835 r270 top (schematic designator R33)
R34 "0805" "SM 0805 - gap trimmed" 250,2315 r0 top
R35 "0805" "SM 0805 - gap trimmed" 255,2500 r0 top
R36 "0805" "SM 0805 - gap trimmed" 255,2685 r0 top
R37 "0603" J1-0603 4749.55,2193.18 r90 top
R38 "0603" J1-0603 4749.55,2093.18 r90 top
R39 "0805" "SM 0805 - gap trimmed" 255,2870 r0 top
R40 "0805" "SM 0805 - gap trimmed" 255,3420 r0 top
R45 "0603" J1-0603 1420,3927.58 r90 top
R46 "0603" J1-0603 1445,3852.58 r0 top
R47 "0805" "SM 0805 - gap trimmed" 1245,4067.58 r270 top
R52 "0603" J1-0603 1085,3922.58 r90 top
R55 "0603" J1-0603 1110,3847.58 r0 top
R56 "0805" "SM 0805 - gap trimmed" 1775,3896.64 r90 top
R58 "0603" J1-0603 2105,3693 r90 top
R59 "0603" J1-0603 2075,3608 r180 top
R60 "0805" "SM 0805 - gap trimmed" 2169,3896.64 r90 top
R62 "0603" J1-0603 2504,3723 r90 top
R63 "0603" J1-0603 2474,3643 r180 top
R64 "0805" "SM 0805 - gap trimmed" 2575,3896.22 r90 top
R66 "0603" J1-0603 2910,3722.58 r90 top
R67 "0603" J1-0603 2880,3642.58 r180 top
R68 "0805" "SM 0805 - gap trimmed" 2975,3896.22 r90 top
R70 "0603" J1-0603 3310,3722.58 r90 top
R71 "0603" J1-0603 3280,3642.58 r180 top
RESET1 "Tactile Switch" TL3301 205,3900 r180 top
T2_ThermocoupleChannel1 "Molex 70543-02" 70543-02 3910,2670 r90 top (schematic designator T2)
T2_ThermocoupleChannel2 "Molex 70543-02" 70543-02 3910,3055 r90 top (schematic designator T2)
TP1 "TP4" TP-2#1 5385,1680 r90 top
TP2 "TP4" TP-2#1 4105,2850 r90 top
TP3 "TP4" TP-2#1 5400,2575 r90 top
TP4 "TP4" TP-2#2 3585,2555 r90 top
TP5 "TP4" TP-2#2 3640,2935 r90 top
TP6 "TP4" TP-2#2 3295,2417.5 r90 top
TP7 "TP4" TP-2#2 3225,2572.4 r90 top
TP8 "TP4" TP-2#2 3225,2470 r90 top
TP32_DriverChannelDRV88251 "TP4" TP-2#1 715,1155 r90 top (schematic designator TP32)
TP32_DriverChannelDRV88252 "TP4" TP-2#1 1590,1155 r270 top (schematic designator TP32)
TP32_DriverChannelDRV88253 "TP4" TP-2#1 2465,1155 r270 top (schematic designator TP32)
TP32_DriverChannelDRV88254 "TP4" TP-2#1 3340,1155 r270 top (schematic designator TP32)
TP32_DriverChannelDRV88255 "TP4" TP-2#1 4215,1155 r270 top (schematic designator TP32)
TP33_DriverChannelDRV88251 "TP4" TP-2#1 860,655 r90 top (schematic designator TP33)
TP33_DriverChannelDRV88252 "TP4" TP-2#1 1743.78,660 r270 top (schematic designator TP33)
TP33_DriverChannelDRV88253 "TP4" TP-2#1 2618.78,660 r270 top (schematic designator TP33)
TP33_DriverChannelDRV88254 "TP4" TP-2#1 3493.78,660 r270 top (schematic designator TP33)
TP33_DriverChannelDRV88255 "TP4" TP-2#1 4365,655 r270 top (schematic designator TP33)
TP34_DriverChannelDRV88251 "TP4" TP-2#1 785,1155 r90 top (schematic designator TP34)
TP34_DriverChannelDRV88252 "TP4" TP-2#1 1660,1155 r90 top (schematic designator TP34)
TP34_DriverChannelDRV88253 "TP4" TP-2#1 2535,1155 r90 top (schematic designator TP34)
TP34_DriverChannelDRV88254 "TP4" TP-2#1 3410,1155 r90 top (schematic designator TP34)
TP34_DriverChannelDRV88255 "TP4" TP-2#1 4285,1155 r90 top (schematic designator TP34)
TP35_DriverChannelDRV88251 "TP4" TP-2#1 575,1155 r90 top (schematic designator TP35)
TP35_DriverChannelDRV88252 "TP4" TP-2#1 1450,1155 r90 top (schematic designator TP35)
TP35_DriverChannelDRV88253 "TP4" TP-2#1 2325,1155 r90 top (schematic designator TP35)
TP35_DriverChannelDRV88254 "TP4" TP-2#1 3200,1155 r90 top (schematic designator TP35)
TP35_DriverChannelDRV88255 "TP4" TP-2#1 4075,1155 r90 top (schematic designator TP35)
TP36_DriverChannelDRV88251 "TP4" TP-2#1 610,1090 r90 top (schematic designator TP36)
TP36_DriverChannelDRV88252 "TP4" TP-2#1 1485,1090 r90 top (schematic designator TP36)
TP36_DriverChannelDRV88253 "TP4" TP-2#1 2360,1090 r90 top (schematic designator TP36)
TP36_DriverChannelDRV88254 "TP4" TP-2#1 3235,1090 r90 top (schematic designator TP36)
TP36_DriverChannelDRV88255 "TP4" TP-2#1 4110,1090 r90 top (schematic designator TP36)
TP37_DriverChannelDRV88251 "TP4" TP-2#1 645,1155 r90 top (schematic designator TP37)
TP37_DriverChannelDRV88252 "TP4" TP-2#1 1520,1155 r90 top (schematic designator TP37)
TP37_DriverChannelDRV88253 "TP4" TP-2#1 2395,1155 r90 top (schematic designator TP37)
TP37_DriverChannelDRV88254 "TP4" TP-2#1 3270,1155 r90 top (schematic designator TP37)
TP37_DriverChannelDRV88255 "TP4" TP-2#1 4145,1155 r90 top (schematic designator TP37)
TP38 "TP4" TP-2#1 3160,2580 r270 bottom
TP39_DriverChannelDRV88251 "TP4" TP-2#1 750,1090 r90 top (schematic designator TP39)
TP39_DriverChannelDRV88252 "TP4" TP-2#1 1625,1090 r90 top (schematic designator TP39)
TP39_DriverChannelDRV88253 "TP4" TP-2#1 2500,1090 r90 top (schematic designator TP39)
TP39_DriverChannelDRV88254 "TP4" TP-2#1 3375,1090 r90 top (schematic designator TP39)
TP39_DriverChannelDRV88255 "TP4" TP-2#1 4250,1090 r90 top (schematic designator TP39)
TP40_DriverChannelDRV88251 "TP4" TP-2#1 680,1090 r90 top (schematic designator TP40)
TP40_DriverChannelDRV88252 "TP4" TP-2#1 1555,1090 r90 top (schematic designator TP40)
TP40_DriverChannelDRV88253 "TP4" TP-2#1 2430,1090 r90 top (schematic designator TP40)
TP40_DriverChannelDRV88254 "TP4" TP-2#1 3305,1090 r90 top (schematic designator TP40)
TP40_DriverChannelDRV88255 "TP4" TP-2#1 4180,1090 r90 top (schematic designator TP40)
TP41 "TP4" TP-2#1 1465,3637 r180 top
TP42 "TP4" TP-2#1 1231.31,3760 r180 top
TP43 "TP4" TP-2#1 2975,2520 r270 bottom
TP44 "TP4" TP-2#1 3015,2580 r270 bottom
TP45 "TP4" TP-2#1 3055,2520 r270 bottom
TP46 "TP4" TP-2#1 3090,2580 r270 bottom
TP47 "TP4" TP-2#1 3125,2520 r270 bottom
TP48 "TP4" TP-2#1 2105,3370 r90 top
TP49 "TP4" TP-2#1 2505,3371 r90 top
TP50 "TP4" TP-2#1 2910,3369 r90 top
TP51 "TP4" TP-2#1 3310,3370 r90 top
TP52_ThermistorChannel1 "TP4" TP-2#1 4165,2570 r90 top (schematic designator TP52)
TP52_ThermistorChannel2 "TP4" TP-2#1 4170.79,2960.79 r90 top (schematic designator TP52)
U1 "MIC24085" MIC24085-AYML 5003.07,1189.53 r0 top
U2 "TPS62142RGTT" RGT16-1700X1700TP 4884.55,2113.18 r270 top
U3 "ATML-ATSAM3X-LQFP-144" LQFP144_N 1490,2255 r270 top locked
U4_ThermocoupleChannel1 "MAX31855EASA+" MAXM-S8+4_N 3635,2675 r90 top (schematic designator U4)
U4_ThermocoupleChannel2 "MAX31855EASA+" MAXM-S8+4_N 3635,3060 r90 top (schematic designator U4)
U5 "PMEG2005AEV115" PMEG2005AEV115 3280,2240 r180 top
U6 "ADuM4160" ADuM4160 690,3430 r270 top
U7_DriverChannelDRV88251 "DRV8825" DRV8825 680,830 r90 top (schematic designator U7)
U7_DriverChannelDRV88252 "DRV8825" DRV8825 1555,830 r90 top (schematic designator U7)
U7_DriverChannelDRV88253 "DRV8825" DRV8825 2430,830 r90 top (schematic designator U7)
U7_DriverChannelDRV88254 "DRV8825" DRV8825 3305,830 r90 top (schematic designator U7)
U7_DriverChannelDRV88255 "DRV8825" DRV8825 4180,830 r90 top (schematic designator U7)
U8 "TXB0106 Level Shifter" TSOP65P640X120-16N 3084,2896 r90 top
USB "USB-B" PN61729 625,4255 r180 top
X2 "445C35A12M00000" 445C35A12M00000 965,2965 r0 top

## Footprints (in the part's own frame and the unit in brackets; to place one, negate y for a bottom-side part, rotate by r counter-clockwise, add the part's x,y. Pads: shape width x height; smd on the part's side, far side on the other; paste and mask are expansions set on the pad)
1N4148WT [mm] "Molded Diode, 2-Leads, Body 1.20x0.80mm, IPC Medium Density"
  rect 1x0.3 smd: 1(-0.675,0) 2(0.675,0)
  silkscreen extent -0.7,-0.5 1.15,0.55, body extent -0.65,-0.45 0.65,0.45, height 0.7
4POL254 [mil]
  oval 60x120 hole 40: 1(-150,0) 2(-50,0) 3(50,0) 4(150,0)
  silkscreen extent -250,-150 250,113, body extent -250,-150 250,113, height 454
10X2-0.05X0.1w [mil]
  round 36 hole 22: 1(225,50) 2(175,50) 3(125,50) 4(75,50) 5(25,50) 6(-25,50) 7(-75,50) 8(-125,50) 9(-175,50) 12(-175,-50) 13(-125,-50) 14(-75,-50) 15(-25,-50) 16(25,-50) 17(75,-50) 18(125,-50) 19(175,-50) 20(225,-50)
  oval 54x36 hole 22 copper offset -9,0: 10(-225,50) 11(-225,-50)
  silkscreen extent -375,-150 375,200, body extent -375,-150 375,200, height 591
445C35A12M00000 [mm] "Crystal Oscillator"
  rect 1.8x2.4 smd: 1(0,0) 2(3.8,0)
  silkscreen extent -1.65,-1.91 5.46,1.91, body extent -1.27,-1.52 5.08,1.52, height 1
1608[0603] [mm] "Chip Capacitor, Body 1.6x0.8mm, IPC High Density"
  rect 0.8x0.9 smd: 1(-0.7,0) 2(0.7,0)
  body extent -0.87,-0.48 0.87,0.48, height 1.3
"3522-2 - WAVE SOLDER" [mil] "3522-2"
  oct 140x200 hole 100: 1(-280,0) 1(-80,0) 2(80,0) 2(280,0)
  silkscreen extent -400,-100 400,100, body extent -402,-103 402,103, height 709
70543-02 [mil]
  oval 60x120 hole 40: 1(-50,0) 2(50,0)
  silkscreen extent -150,-150 150,113, body extent -150,-150 150,113, height 450
70543-03 [mil]
  oval 60x120 hole 40: 1(-100,0) 2(0,0) 3(100,0)
  silkscreen extent -200,-150 200,113, body extent -200,-150 200,113, height 450
ADuM4160 [mm] "SOIC, 16-Leads, Body 10.30x7.50mm, Pitch 1.27mm, IPC Medium Density"
  oval 2.3x0.6 smd: 1(-4.575,4.445) 2(-4.575,3.175) 3(-4.575,1.905) 4(-4.575,0.635) 5(-4.575,-0.635) 6(-4.575,-1.905) 7(-4.575,-3.175) 8(-4.575,-4.445) 9(4.575,-4.445) 10(4.575,-3.175) 11(4.575,-1.905) 12(4.575,-0.635) 13(4.575,0.635) 14(4.575,1.905) 15(4.575,3.175) 16(4.575,4.445)
  silkscreen extent -4.7,-5.25 3.03,5.42, body extent -3.8,-5.25 3.8,5.25, height 2.65
BLM18PG121SN1D [mm] "Chip Inductor, 2-Leads, Body 1.0x0.5mm, IPC Medium Density"
  rect 0.8x0.6 smd: 1(-0.6,0) 2(0.6,0)
  body extent -0.52,-0.28 0.53,0.27, height 0.6
C1206 [mm] "Chip Capacitor, Body 3.2x1.6mm, IPC High Density"
  rect 1.1x1.7 smd: 1(-1.35,0) 2(1.35,0)
  silkscreen extent -0.4,-0.75 0.4,0.75, body extent -1.7,-0.9 1.7,0.9, height 1.3
C1210 [mm] "Chip Capacitor, Body 3.2x2.5mm, IPC High Density"
  rect 1.1x2.6 smd: 1(-1.35,0) 2(1.35,0)
  silkscreen extent -0.4,-1.2 0.4,1.2, body extent -1.7,-1.35 1.7,1.35, height 1.3
CIP0530LR3R3 [mm] "Precision Wire Wound Inductor, 2-Leads, Body 5.58x5.30mm, IPC Medium Density"
  rect 2.55x2.7 smd: 1(-2.175,0) 2(2.175,0)
  silkscreen extent -2.9,-2.7 2.9,2.7, body extent -2.88,-2.7 2.88,2.7, height 2.29
DRV8825 [mm] "TSOP, 28-Leads, Body 9.70x4.40mm, Pitch 0.65mm, Thermal Pad 5.22.2x3.10.2mm, IPC Medium Density"
  oval 1.7x0.35 smd: 1(-2.85,4.225) 2(-2.85,3.575) 3(-2.85,2.925) 4(-2.85,2.275) 5(-2.85,1.625) 6(-2.85,0.975) 7(-2.85,0.325) 8(-2.85,-0.325) 9(-2.85,-0.975) 10(-2.85,-1.625) 11(-2.85,-2.275) 12(-2.85,-2.925) 13(-2.85,-3.575) 14(-2.85,-4.225) 15(2.85,-4.225) 16(2.85,-3.575) 17(2.85,-2.925) 18(2.85,-2.275) 19(2.85,-1.625) 20(2.85,-0.975) 21(2.85,-0.325) 22(2.85,0.325) 23(2.85,0.975) 24(2.85,1.625) 25(2.85,2.275) 26(2.85,2.925) 27(2.85,3.575) 28(2.85,4.225)
  rect 3.1x5.22 smd: 29(0,0)
  silkscreen extent -2.97,-4.9 1.6,5.07, body extent -2.25,-4.9 2.25,4.9, height 1.2
F1210_M [mm] "Bournes PTC Fuse"
  rect 1x2.5 smd: 1(-1.5,0) 2(1.5,0)
  silkscreen extent -0.4,-1.3 0.4,1.3, body extent -1.7,-1.35 1.7,1.4, height 0.85
FIDUCIAL-1X2 [mil]
  rrect100% 40x40 smd paste-3897.64 mask+20: 1(0,0)
  body extent -40,-40 40,40, height 1
IRLML6346 [mm] "SOT23, 3-Leads, Body 2.92x2.37mm, Pitch 0.95mm, IPC Medium Density"
  rect 1.6x0.6 smd: 1(-0.9,0.95) 2(-0.9,-0.95) 3(0.9,0)
  silkscreen extent -1.02,-1.5 0.7,1.92, body extent -0.7,-1.52 0.7,1.52, height 1.12
J1-0603 [mm] "Chip Resistor, Body 1.6x0.8mm, IPC High Density"
  rect 0.7x0.9 smd: 1(-0.75,0) 2(0.75,0)
  silkscreen extent -0.2,-0.35 0.2,0.35, body extent -0.85,-0.48 0.85,0.48, height 0.9
LQFP144_N [mm] "Thin QFP, 144-Leads, Body 20x20mm, Pitch 0.5mm, IPC Medium Density"
  oval 1.8x0.3 smd: 1(-10.55,8.75) 2(-10.55,8.25) 3(-10.55,7.75) 4(-10.55,7.25) 5(-10.55,6.75) 6(-10.55,6.25) 7(-10.55,5.75) 8(-10.55,5.25) 9(-10.55,4.75) 10(-10.55,4.25) 11(-10.55,3.75) 12(-10.55,3.25) 13(-10.55,2.75) 14(-10.55,2.25) 15(-10.55,1.75) 16(-10.55,1.25) 17(-10.55,0.75) 18(-10.55,0.25) 19(-10.55,-0.25) 20(-10.55,-0.75) 21(-10.55,-1.25) 22(-10.55,-1.75) 23(-10.55,-2.25) 24(-10.55,-2.75) 25(-10.55,-3.25) 26(-10.55,-3.75) 27(-10.55,-4.25) 28(-10.55,-4.75) 29(-10.55,-5.25) 30(-10.55,-5.75) 31(-10.55,-6.25) 32(-10.55,-6.75) 33(-10.55,-7.25) 34(-10.55,-7.75) 35(-10.55,-8.25) 36(-10.55,-8.75) 73(10.55,-8.75) 74(10.55,-8.25) 75(10.55,-7.75) 76(10.55,-7.25) 77(10.55,-6.75) 78(10.55,-6.25) 79(10.55,-5.75) 80(10.55,-5.25) 81(10.55,-4.75) 82(10.55,-4.25) 83(10.55,-3.75) 84(10.55,-3.25) 85(10.55,-2.75) 86(10.55,-2.25) 87(10.55,-1.75) 88(10.55,-1.25) 89(10.55,-0.75) 90(10.55,-0.25) 91(10.55,0.25) 92(10.55,0.75) 93(10.55,1.25) 94(10.55,1.75) 95(10.55,2.25) 96(10.55,2.75) 97(10.55,3.25) 98(10.55,3.75) 99(10.55,4.25) 100(10.55,4.75) 101(10.55,5.25) 102(10.55,5.75) 103(10.55,6.25) 104(10.55,6.75) 105(10.55,7.25) 106(10.55,7.75) 107(10.55,8.25) 108(10.55,8.75)
  oval 0.3x1.8 smd: 37(-8.75,-10.55) 38(-8.25,-10.55) 39(-7.75,-10.55) 40(-7.25,-10.55) 41(-6.75,-10.55) 42(-6.25,-10.55) 43(-5.75,-10.55) 44(-5.25,-10.55) 45(-4.75,-10.55) 46(-4.25,-10.55) 47(-3.75,-10.55) 48(-3.25,-10.55) 49(-2.75,-10.55) 50(-2.25,-10.55) 51(-1.75,-10.55) 52(-1.25,-10.55) 53(-0.75,-10.55) 54(-0.25,-10.55) 55(0.25,-10.55) 56(0.75,-10.55) 57(1.25,-10.55) 58(1.75,-10.55) 59(2.25,-10.55) 60(2.75,-10.55) 61(3.25,-10.55) 62(3.75,-10.55) 63(4.25,-10.55) 64(4.75,-10.55) 65(5.25,-10.55) 66(5.75,-10.55) 67(6.25,-10.55) 68(6.75,-10.55) 69(7.25,-10.55) 70(7.75,-10.55) 71(8.25,-10.55) 72(8.75,-10.55) 109(8.75,10.55) 110(8.25,10.55) 111(7.75,10.55) 112(7.25,10.55) 113(6.75,10.55) 114(6.25,10.55) 115(5.75,10.55) 116(5.25,10.55) 117(4.75,10.55) 118(4.25,10.55) 119(3.75,10.55) 120(3.25,10.55) 121(2.75,10.55) 122(2.25,10.55) 123(1.75,10.55) 124(1.25,10.55) 125(0.75,10.55) 126(0.25,10.55) 127(-0.25,10.55) 128(-0.75,10.55) 129(-1.25,10.55) 130(-1.75,10.55) 131(-2.25,10.55) 132(-2.75,10.55) 133(-3.25,10.55) 134(-3.75,10.55) 135(-4.25,10.55) 136(-4.75,10.55) 137(-5.25,10.55) 138(-5.75,10.55) 139(-6.25,10.55) 140(-6.75,10.55) 141(-7.25,10.55) 142(-7.75,10.55) 143(-8.25,10.55) 144(-8.75,10.55)
  silkscreen extent -10.67,-9.25 9.25,9.58, body extent -10,-10 10,10, height 1.6
MAXM-S8+4_N [mm] "SOIC, 8-Leads, Body 4.9x3.9mm, Pitch 1.27mm, IPC Medium Density"
  oval 2.2x0.6 smd: 1(-2.4,1.905) 2(-2.4,0.635) 3(-2.4,-0.635) 4(-2.4,-1.905) 5(2.4,-1.905) 6(2.4,-0.635) 7(2.4,0.635) 8(2.4,1.905)
  silkscreen extent -2.52,-2.5 0.9,2.88, body extent -2,-2.5 2,2.5, height 1.75
MIC24085-AYML [mm] "QFN, 16-Leads, Body 3.25x3.25mm, Pitch 0.50mm, Thermal Pad 1.73x1.73mm, IPC Medium Density"
  oval 0.8x0.25 smd: 1(-1.7,0.75) 2(-1.7,0.25) 3(-1.7,-0.25) 4(-1.7,-0.75) 9(1.7,-0.75) 10(1.7,-0.25) 11(1.7,0.25) 12(1.7,0.75)
  oval 0.25x0.8 smd: 5(-0.75,-1.7) 6(-0.25,-1.7) 7(0.25,-1.7) 8(0.75,-1.7) 13(0.75,1.7) 14(0.25,1.7) 15(-0.25,1.7) 16(-0.75,1.7)
  rect 1.73x1.73 smd: 17(0,0)
  silkscreen extent -2.67,-1.9 1.9,1.9, body extent -1.75,-1.75 1.75,1.75, height 0.85
"MSTBV2 - duplicate" [mil]
  oval 82.5x165 hole 55: 1(-300,0) 2(-100,0)
  silkscreen extent -425,-150 25,180, body extent -425,-150 25,180, height 472
MSTBV4#1 [mil]
  oval 165x82.5 hole 55: 1(0,700) 2(0,500) 3(0,300) 4(0,100) 5(0,-100) 6(0,-300) 7(0,-500) 8(0,-700)
  silkscreen extent -150,-825 180,825, body extent -150,-825 180,825, height 472
MSTBV4#2 [mil]
  oval 82.5x165 hole 55: 1(-300,0) 2(-100,0) 3(100,0) 4(300,0)
  silkscreen extent -425,-150 425,180, body extent -428,-153 428,183, height 472
"Panasonic VS C" [mm]
  rect 3x1.4 smd: 1(5.348,2.921) 2(0.748,2.921)
  silkscreen extent 0.05,0.22 6.05,5.62, body extent 0.1,0.29 6,5.59, height 5.41
"Panasonic VS D" [mm]
  rect 3.4x1.4 smd: 1(2.6,0) 2(-2.6,0)
  silkscreen extent -3,-3.2 3,3.2, body extent -3.5,-3.3 3.5,3.3, height 5.4
PMEG1030EH_EJ [mm] "Molded Diode, 2-Leads, Body 2.60x1.60mm, IPC Medium Density"
  rect 1.3x0.65 smd: 1(-1.225,0) 2(1.225,0)
  silkscreen extent -1.4,-0.85 1.85,0.85, body extent -1.35,-0.85 1.35,0.85, height 1.2
PMEG2005AEV115 [mm] "SOT23, 6-Leads, Body 1.7x1.7mm (max), Pitch 0.50mm, IPC Medium Density"
  rect 0.7x0.3 smd: 1(-0.75,0.5) 2(-0.75,0) 3(-0.75,-0.5) 4(0.75,-0.5) 5(0.75,0) 6(0.75,0.5)
  silkscreen extent -0.88,-0.85 0.1,1.32, body extent -0.65,-0.85 0.65,0.85, height 0.6
PN61729 [mil]
  oct 66x66 hole 38: 1(50,186) 2(-49.21,186) 3(-49.21,107) 4(50,107)
  round 130.5 hole 87: P$1(-236.22,0) P$2(237,0)
  silkscreen extent -232,-400 233,221, body extent -237,-405 238,226, height 406
PSMN7R0-60YS [mm] "TO, 5-Pads, Body 5.15x5.86mm (max), IPC Medium Density"
  rect 1.8x0.6 smd: 1(-2.6,1.905) 2(-2.6,0.635) 3(-2.6,-0.635) 4(-2.6,-1.905)
  rect 4.8x4.5 smd: 5(1.14,0)
  silkscreen extent -2.72,2.63 -2.48,2.88, body extent -1.85,-2.5 2.25,2.5, height 1.2
Resistor2512 [mm]
  rect 1.6x3.1 smd: 1(-3.25,0) 2(3.25,0)
  silkscreen extent -2.26,-1.3 2.26,1.3, body extent -3.24,-1.4 3.24,1.4, height 0.9
RGT16-1700X1700TP [mm] "QFN, 16-Leads, Body 3x3mm, Pitch 0.5mm, Thermal Pad 1.7x1.7mm, TI Recommended"
  oval 0.85x0.28 smd paste-0.025 mask+0.07: 1(-1.475,0.75) 2(-1.475,0.25) 3(-1.475,-0.25) 4(-1.475,-0.75) 9(1.475,-0.75) 10(1.475,-0.25) 11(1.475,0.25) 12(1.475,0.75)
  oval 0.28x0.85 smd paste-0.025 mask+0.07: 5(-0.75,-1.475) 6(-0.25,-1.475) 7(0.25,-1.475) 8(0.75,-1.475) 13(0.75,1.475) 14(0.25,1.475) 15(-0.25,1.475) 16(-0.75,1.475)
  rect 1.7x1.7 smd paste-0.85 mask+0.07: 17(0,0)
  silkscreen extent -2.5,-1.73 1.73,1.73, body extent -1.57,-1.57 1.58,1.58, height 1
S9015E-05-ND [mm] "10 Pin Cortex JTAG Debug Header"
  round 1.1 hole 0.508: 1(5.08,0) 2(5.08,-1.27) 3(3.81,0) 4(3.81,-1.27) 5(2.54,0) 6(2.54,-1.27) 7(1.27,0) 8(1.27,-1.27) 9(0,0) 10(0,-1.27)
  round 0.5 on Top Overlay: 1(7,0.8)
  silkscreen extent -1.25,-2.5 6.5,1.25
SK310A-TP [mm] "Molded Diode, 2-Leads, Body 4.31x2.69mm, IPC Medium Density"
  rect 2.3x2.15 smd: 1(-1.625,0) 2(1.625,0)
  silkscreen extent -2.3,-1.45 3.07,1.75, body extent -2.29,-1.42 2.28,1.42, height 2.95
"SM 0805 - gap trimmed" [mm]
  rect 1x1.5 smd: 1(-1.1,0) 2(1.1,0)
  silkscreen extent -0.36,-0.64 0.35,0.63
"SM 0805 polarized" [mm]
  rect 1x1.5 smd: 1(0.93,-1.105) 2(3.13,-1.105)
  silkscreen extent 0.1,-1.9 2.38,-0.3
SOT95P230X110-3N [mm] "SOT23, 3-Leads, Body 2.90x2.30mm, Pitch 0.95mm, IPC Medium Density"
  rect 1.4x0.6 smd: 1(-0.95,0.95) 2(-0.95,-0.95) 3(0.95,0)
  silkscreen extent -1.07,-1.5 0.7,1.93, body extent -0.7,-1.5 0.7,1.5, height 1.1
SZMM3Z4V7T1G [mm] "Molded Diode, 2-Leads, Body 1.70x1.25mm, IPC Medium Density"
  rect 0.9x0.35 smd: 1(-1,0) 2(1,0)
  silkscreen extent -0.95,-0.7 1.4,0.7, body extent -0.9,-0.67 0.9,0.67, height 1
TL3301 [mm]
  rect 1.4x2.1 smd: 1(-2.3,4.5) 1(-2.3,-4.5) 2(2.3,4.5) 2(2.3,-4.5)
  silkscreen extent -2.2,-2.4 2.2,2.4
TP-2#1 [mil]
  round 50 smd: 1(0,0)
TP-2#2 [mil]
  round 50 smd far side: 1(0,0)
TSOP65P640X120-16N [mm] "TSOP, 16-Leads, Body 5.00x4.40mm, Pitch 0.65mm, IPC Medium Density"
  oval 1.65x0.35 smd: 1(-2.825,2.275) 2(-2.825,1.625) 3(-2.825,0.975) 4(-2.825,0.325) 5(-2.825,-0.325) 6(-2.825,-0.975) 7(-2.825,-1.625) 8(-2.825,-2.275) 9(2.825,-2.275) 10(2.825,-1.625) 11(2.825,-0.975) 12(2.825,-0.325) 13(2.825,0.325) 14(2.825,0.975) 15(2.825,1.625) 16(2.825,2.275)
  silkscreen extent -2.95,-2.55 1.6,3.12, body extent -2.25,-2.55 2.25,2.55, height 1.2
VLS252012T-2R2M1R3 [mm] "Precision Wire Wound Inductor, 2-Leads, Body 2.5x2.0mm, IPC Medium Density"
  rect 1.65x2.1 smd: 1(-1.025,0) 2(1.025,0)
  body extent -1.3,-1.05 1.3,1.05, height 1.2